# Altium PCB PCB1.PcbDoc (part 1 of 7)
Units mm, origin at the board's own origin, x right, y up, seen from the top; angles counter-clockwise.
Board outline 100 x 100 mm, 6 copper layers (Top, GND_1, Signal, PWR, GND_2, Bottom), stack 0.816 mm thick; 321 components, 260 nets, 1718 pads, 694 vias.
Unrouted connection lines stored in the file: 527.
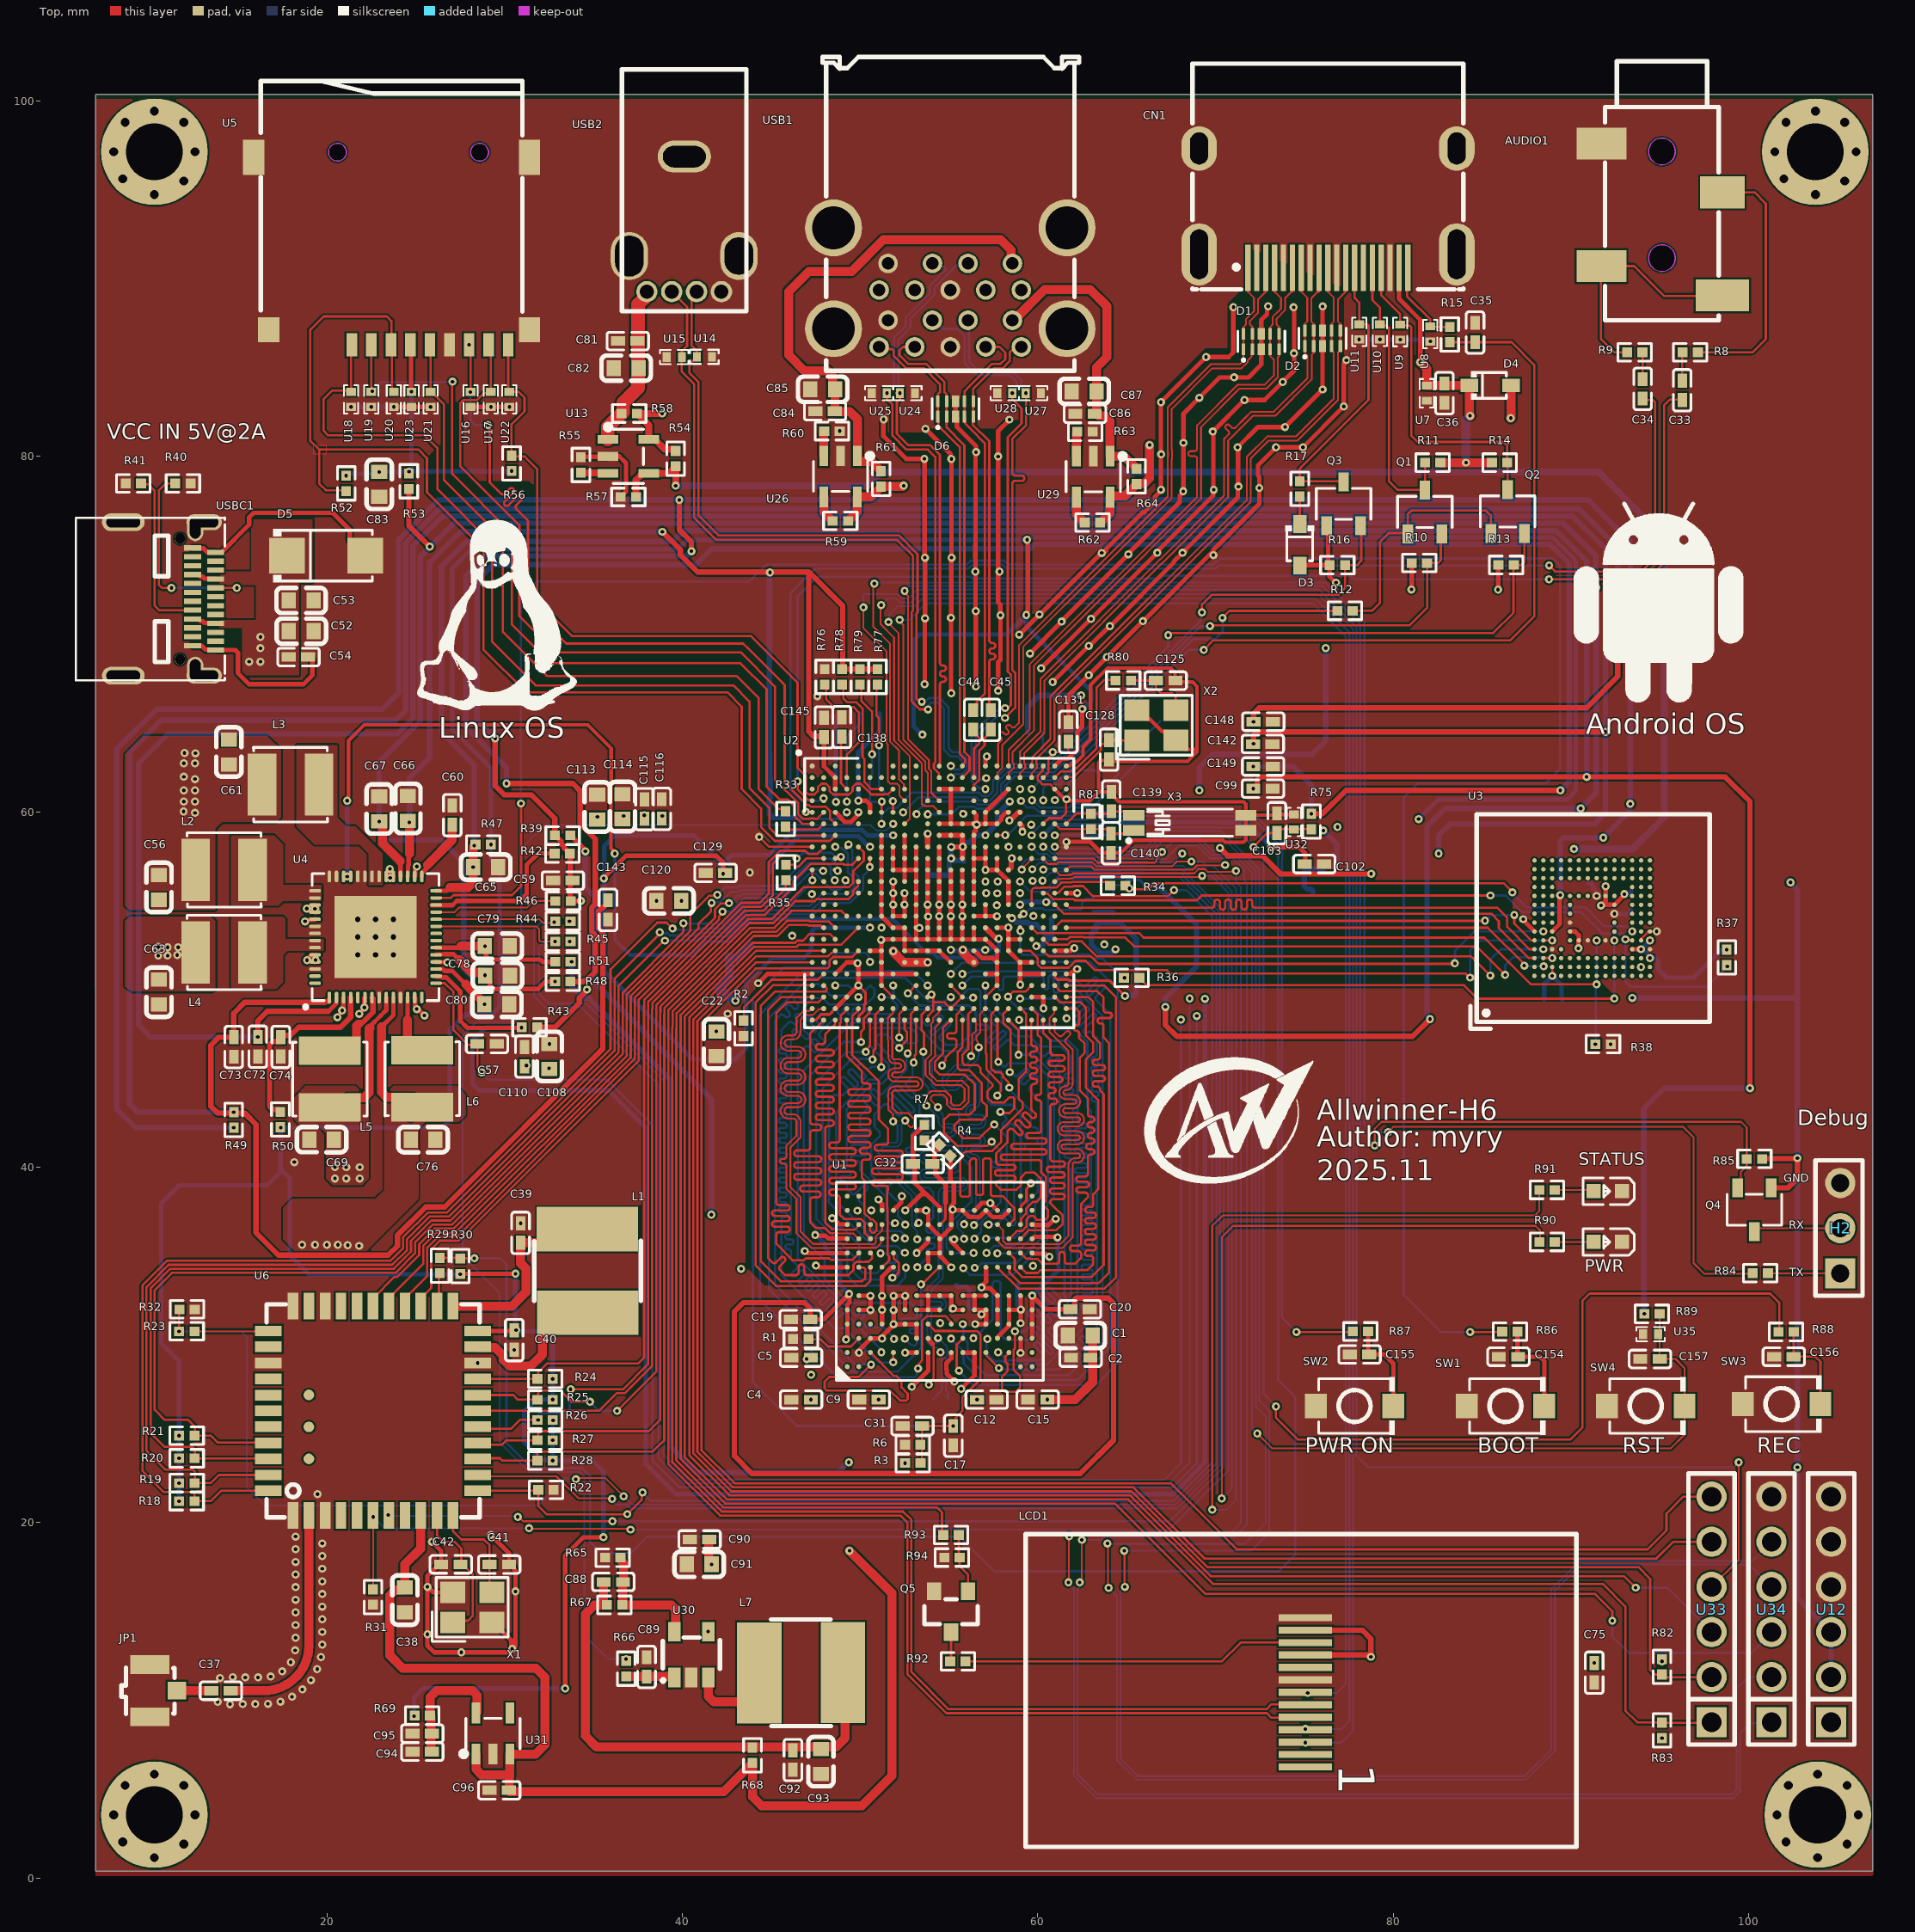
[diagram p0: Top view]
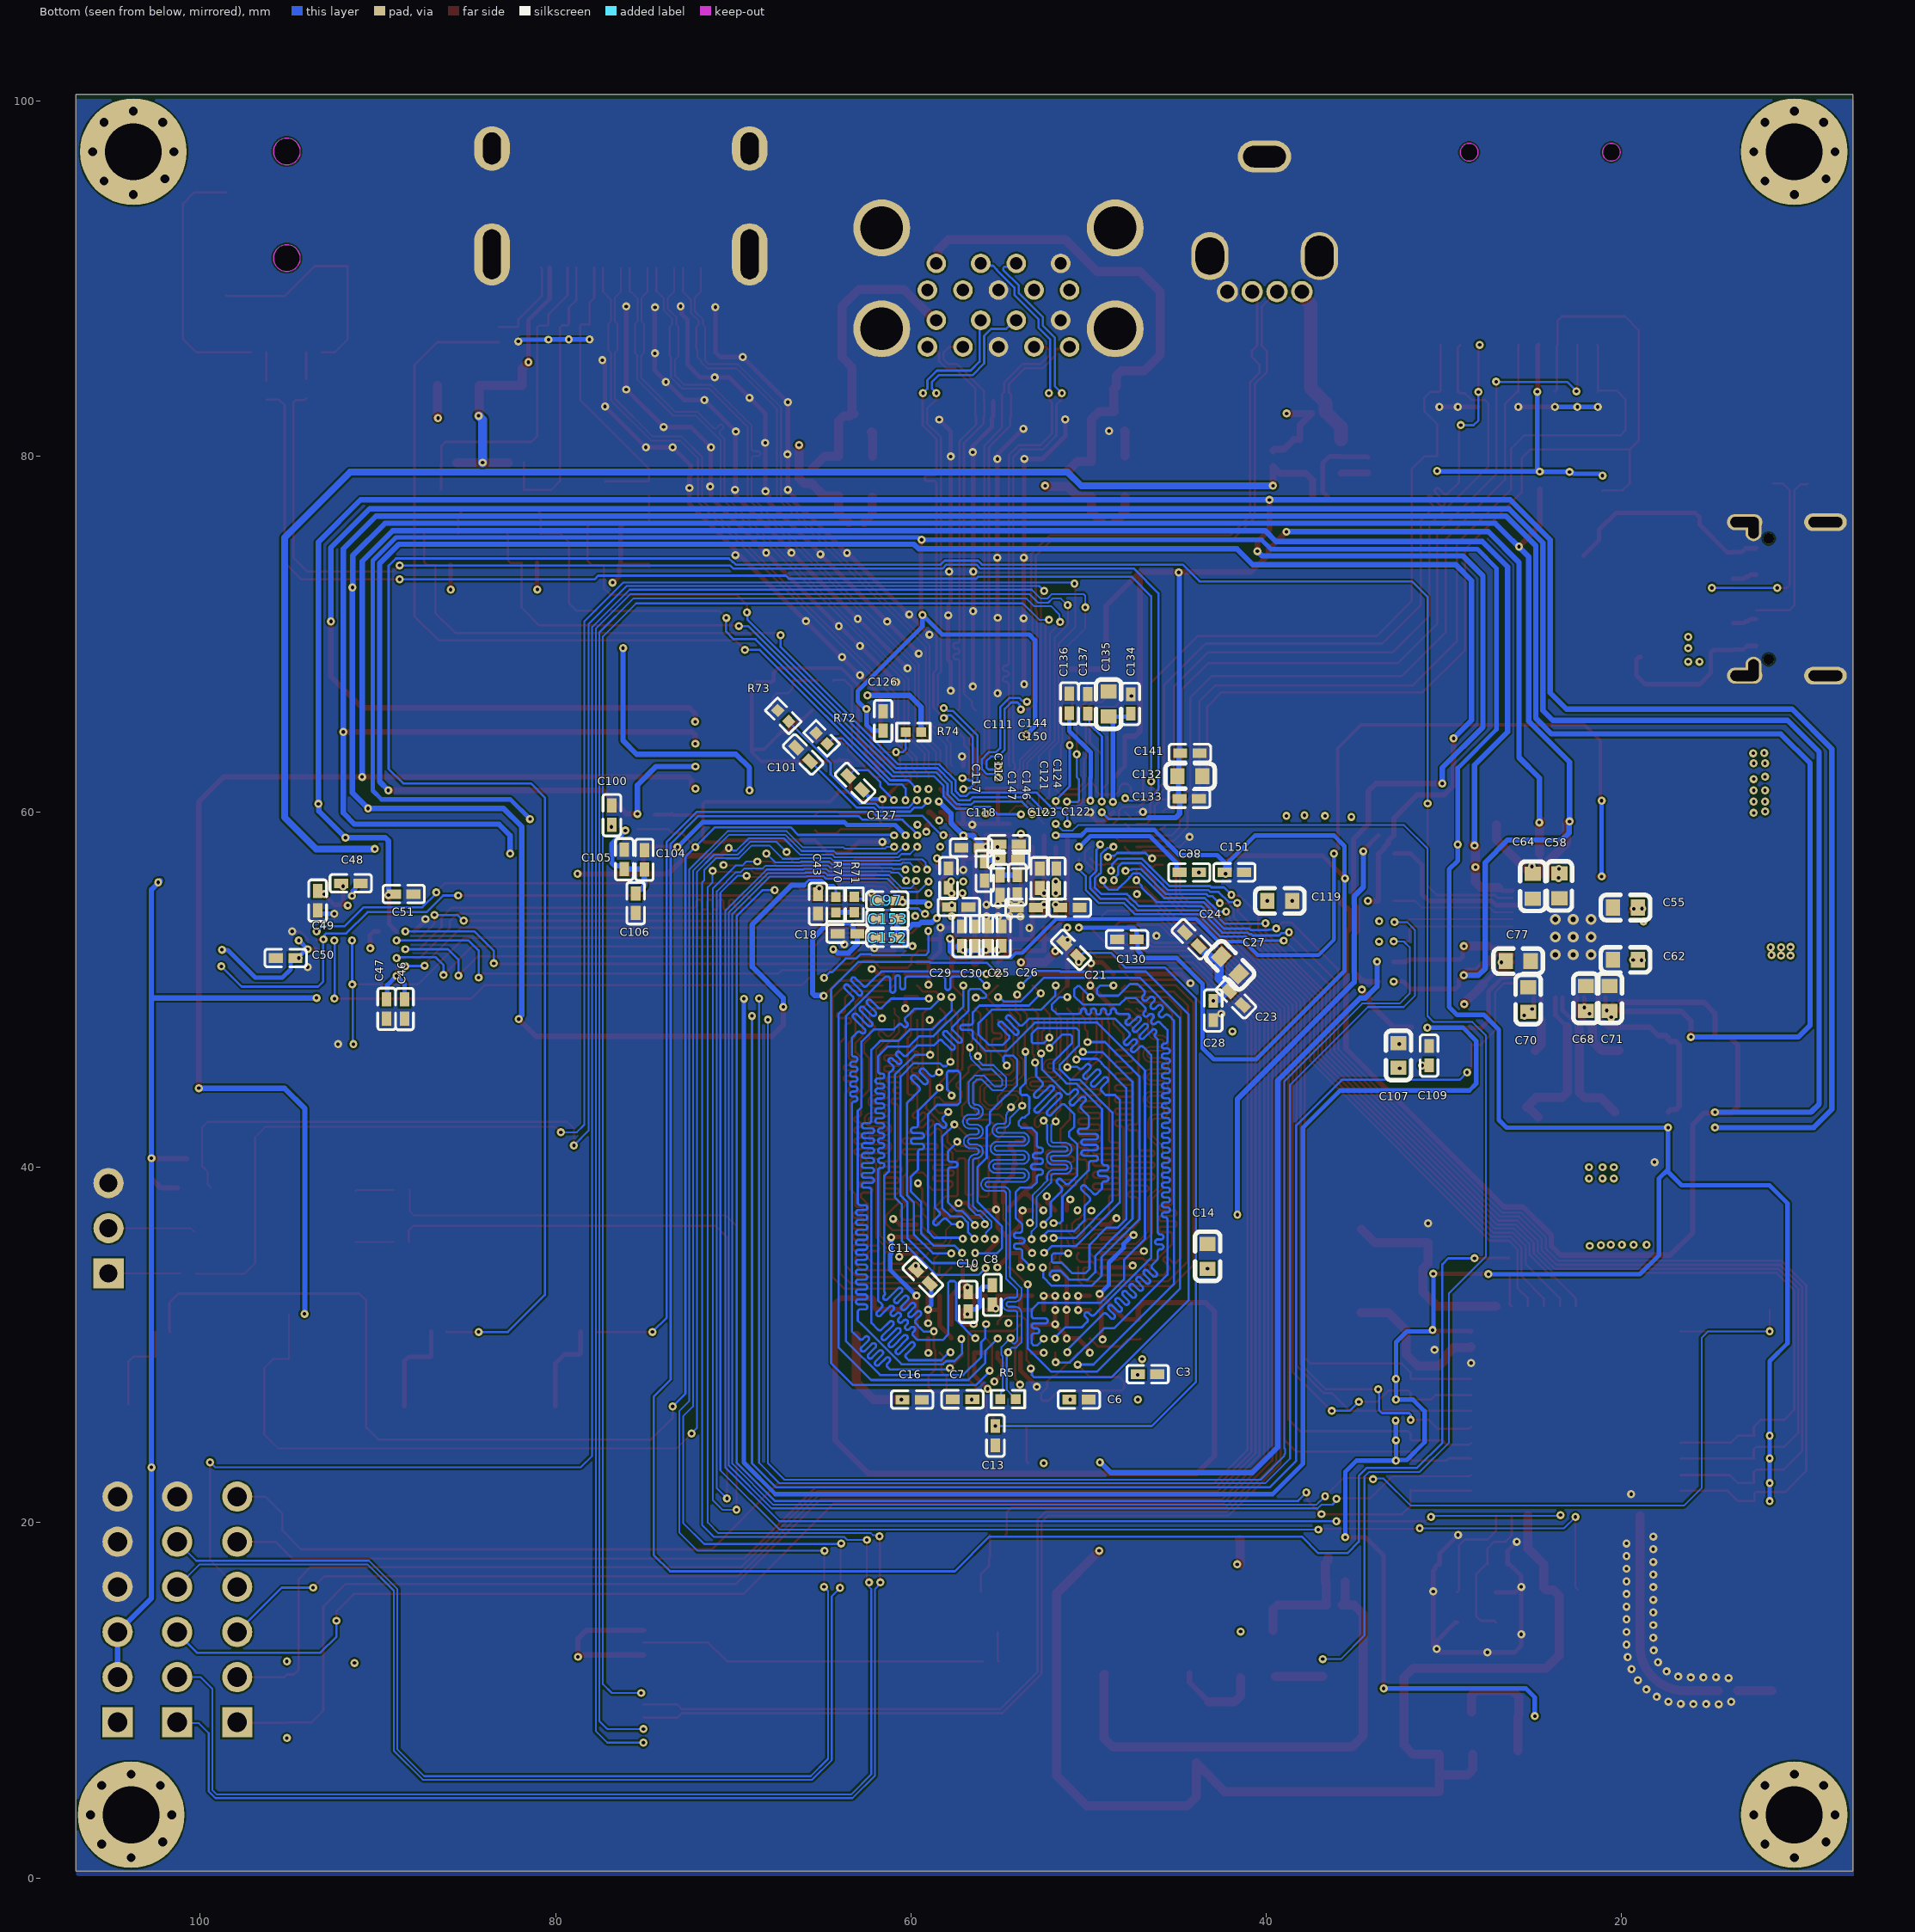
[diagram p1: Bottom view, seen from below]
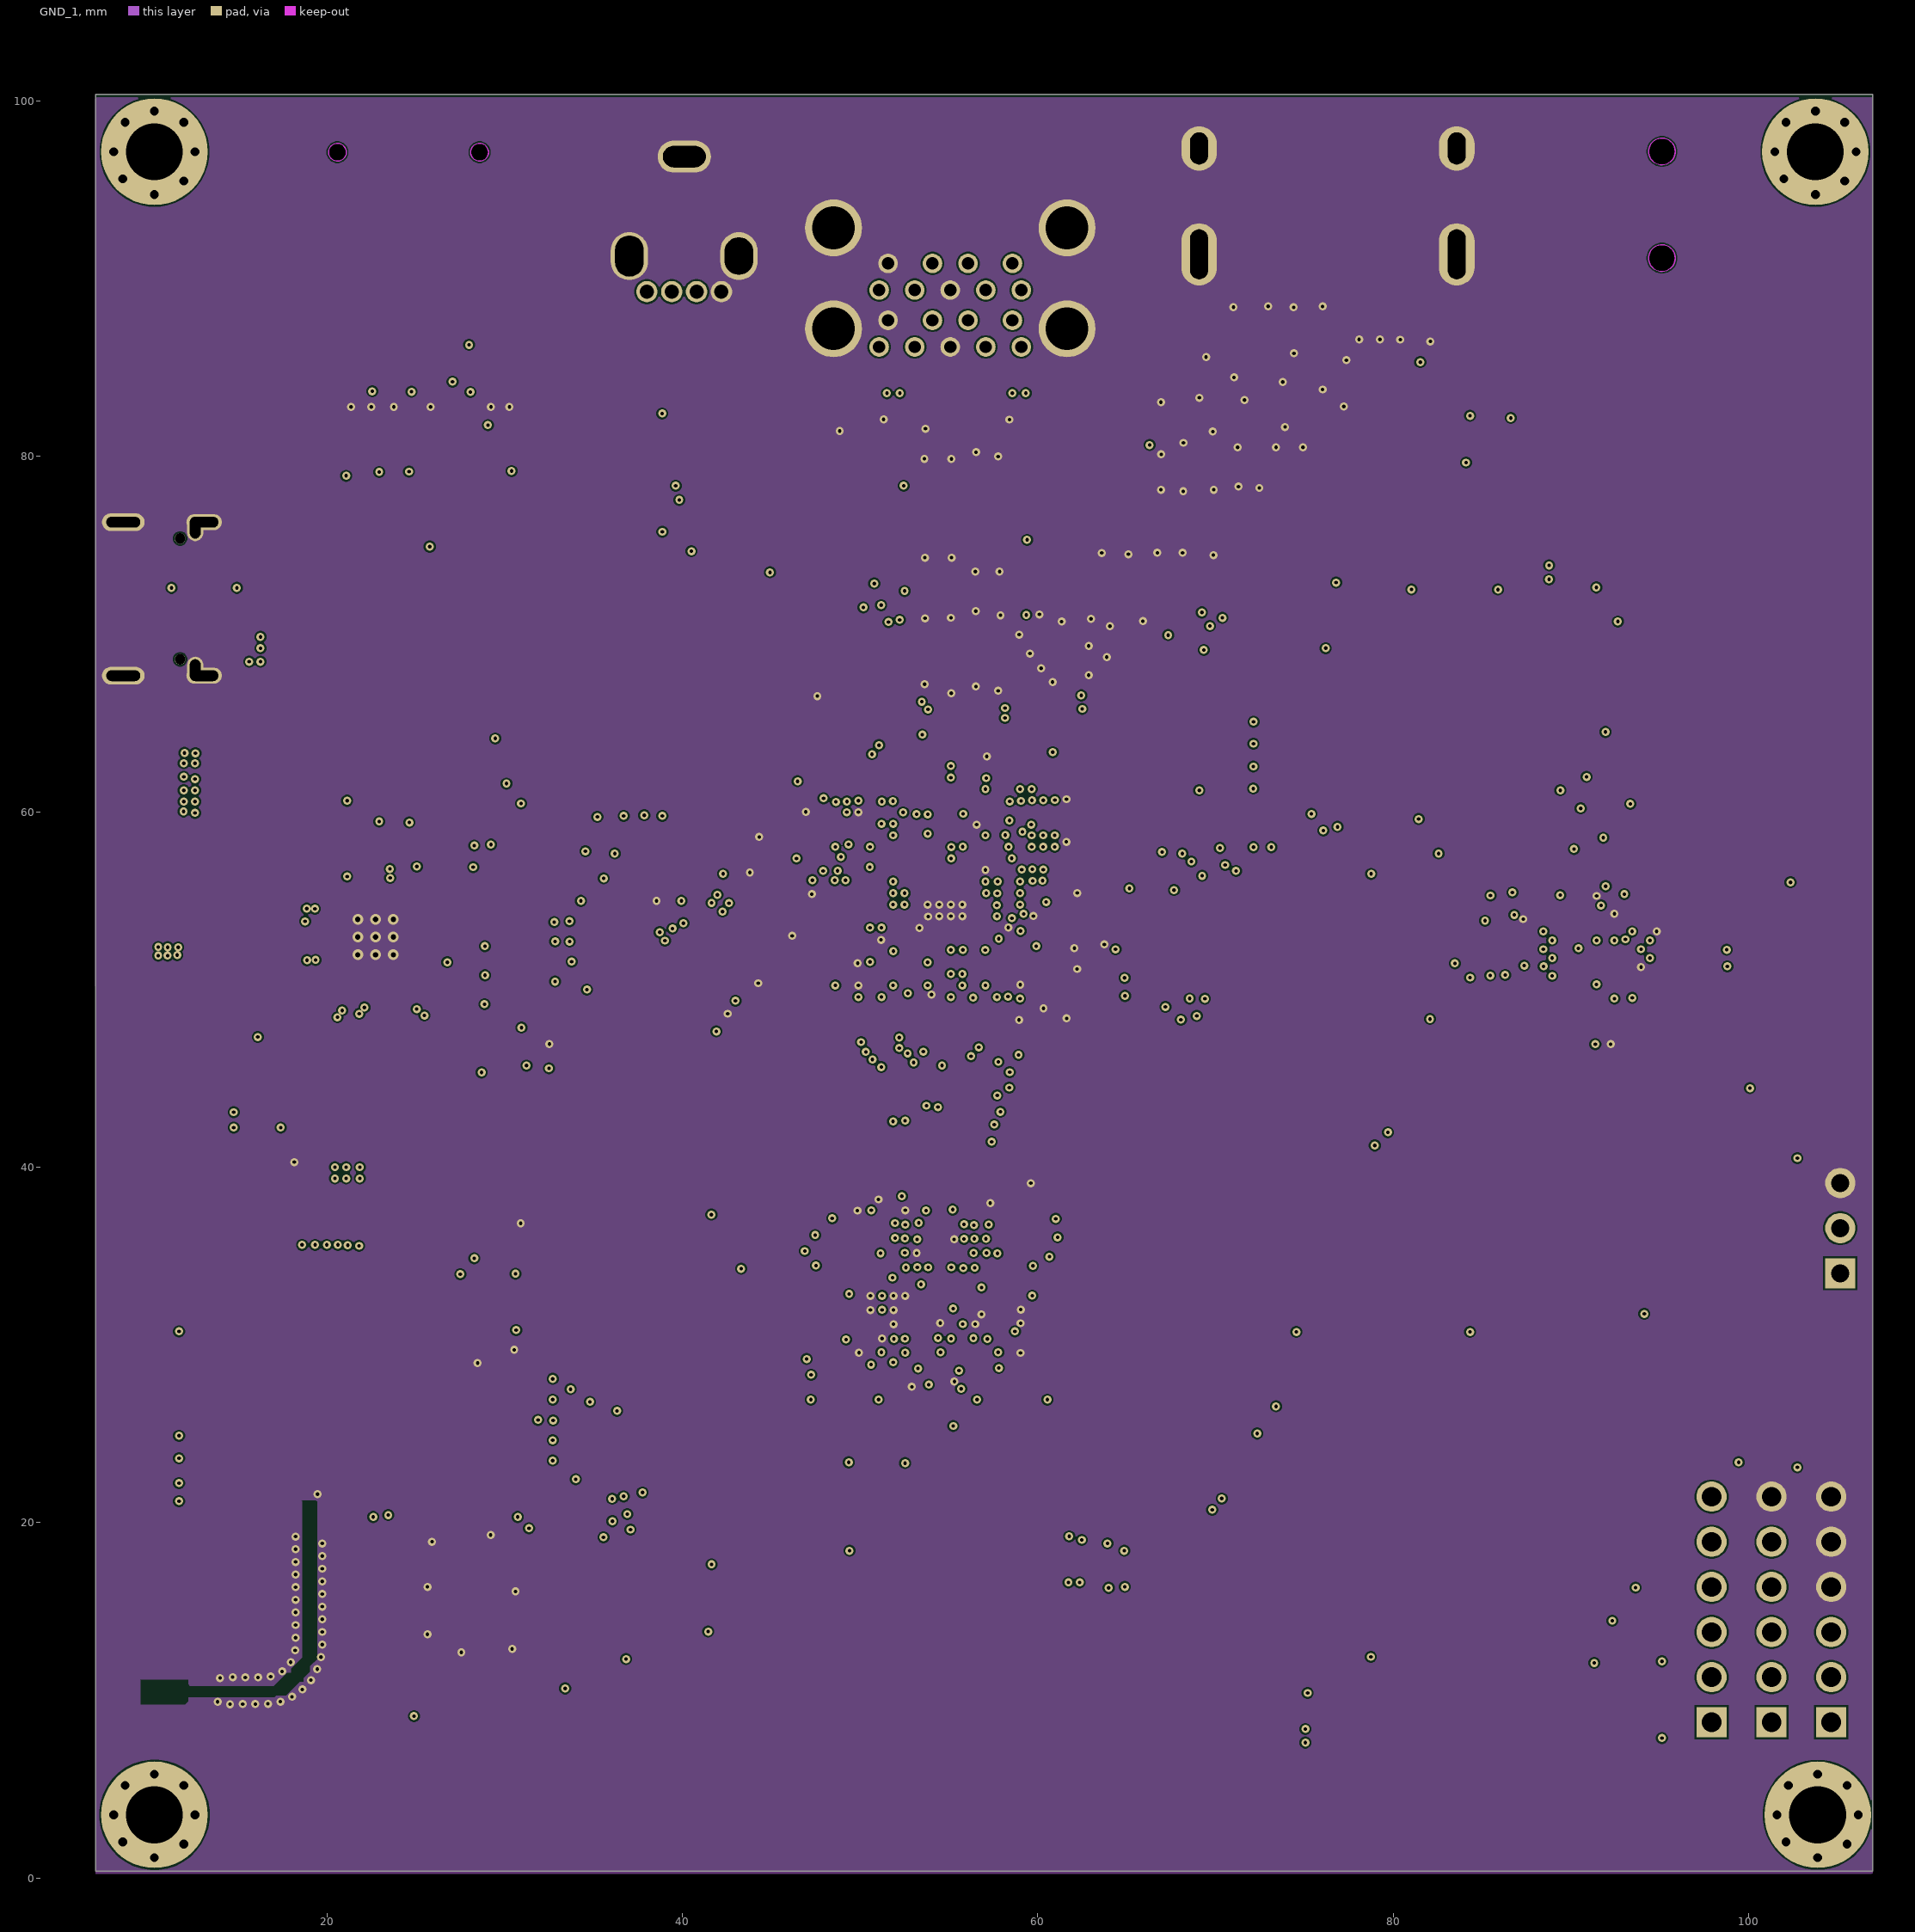
[diagram p2: GND_1]
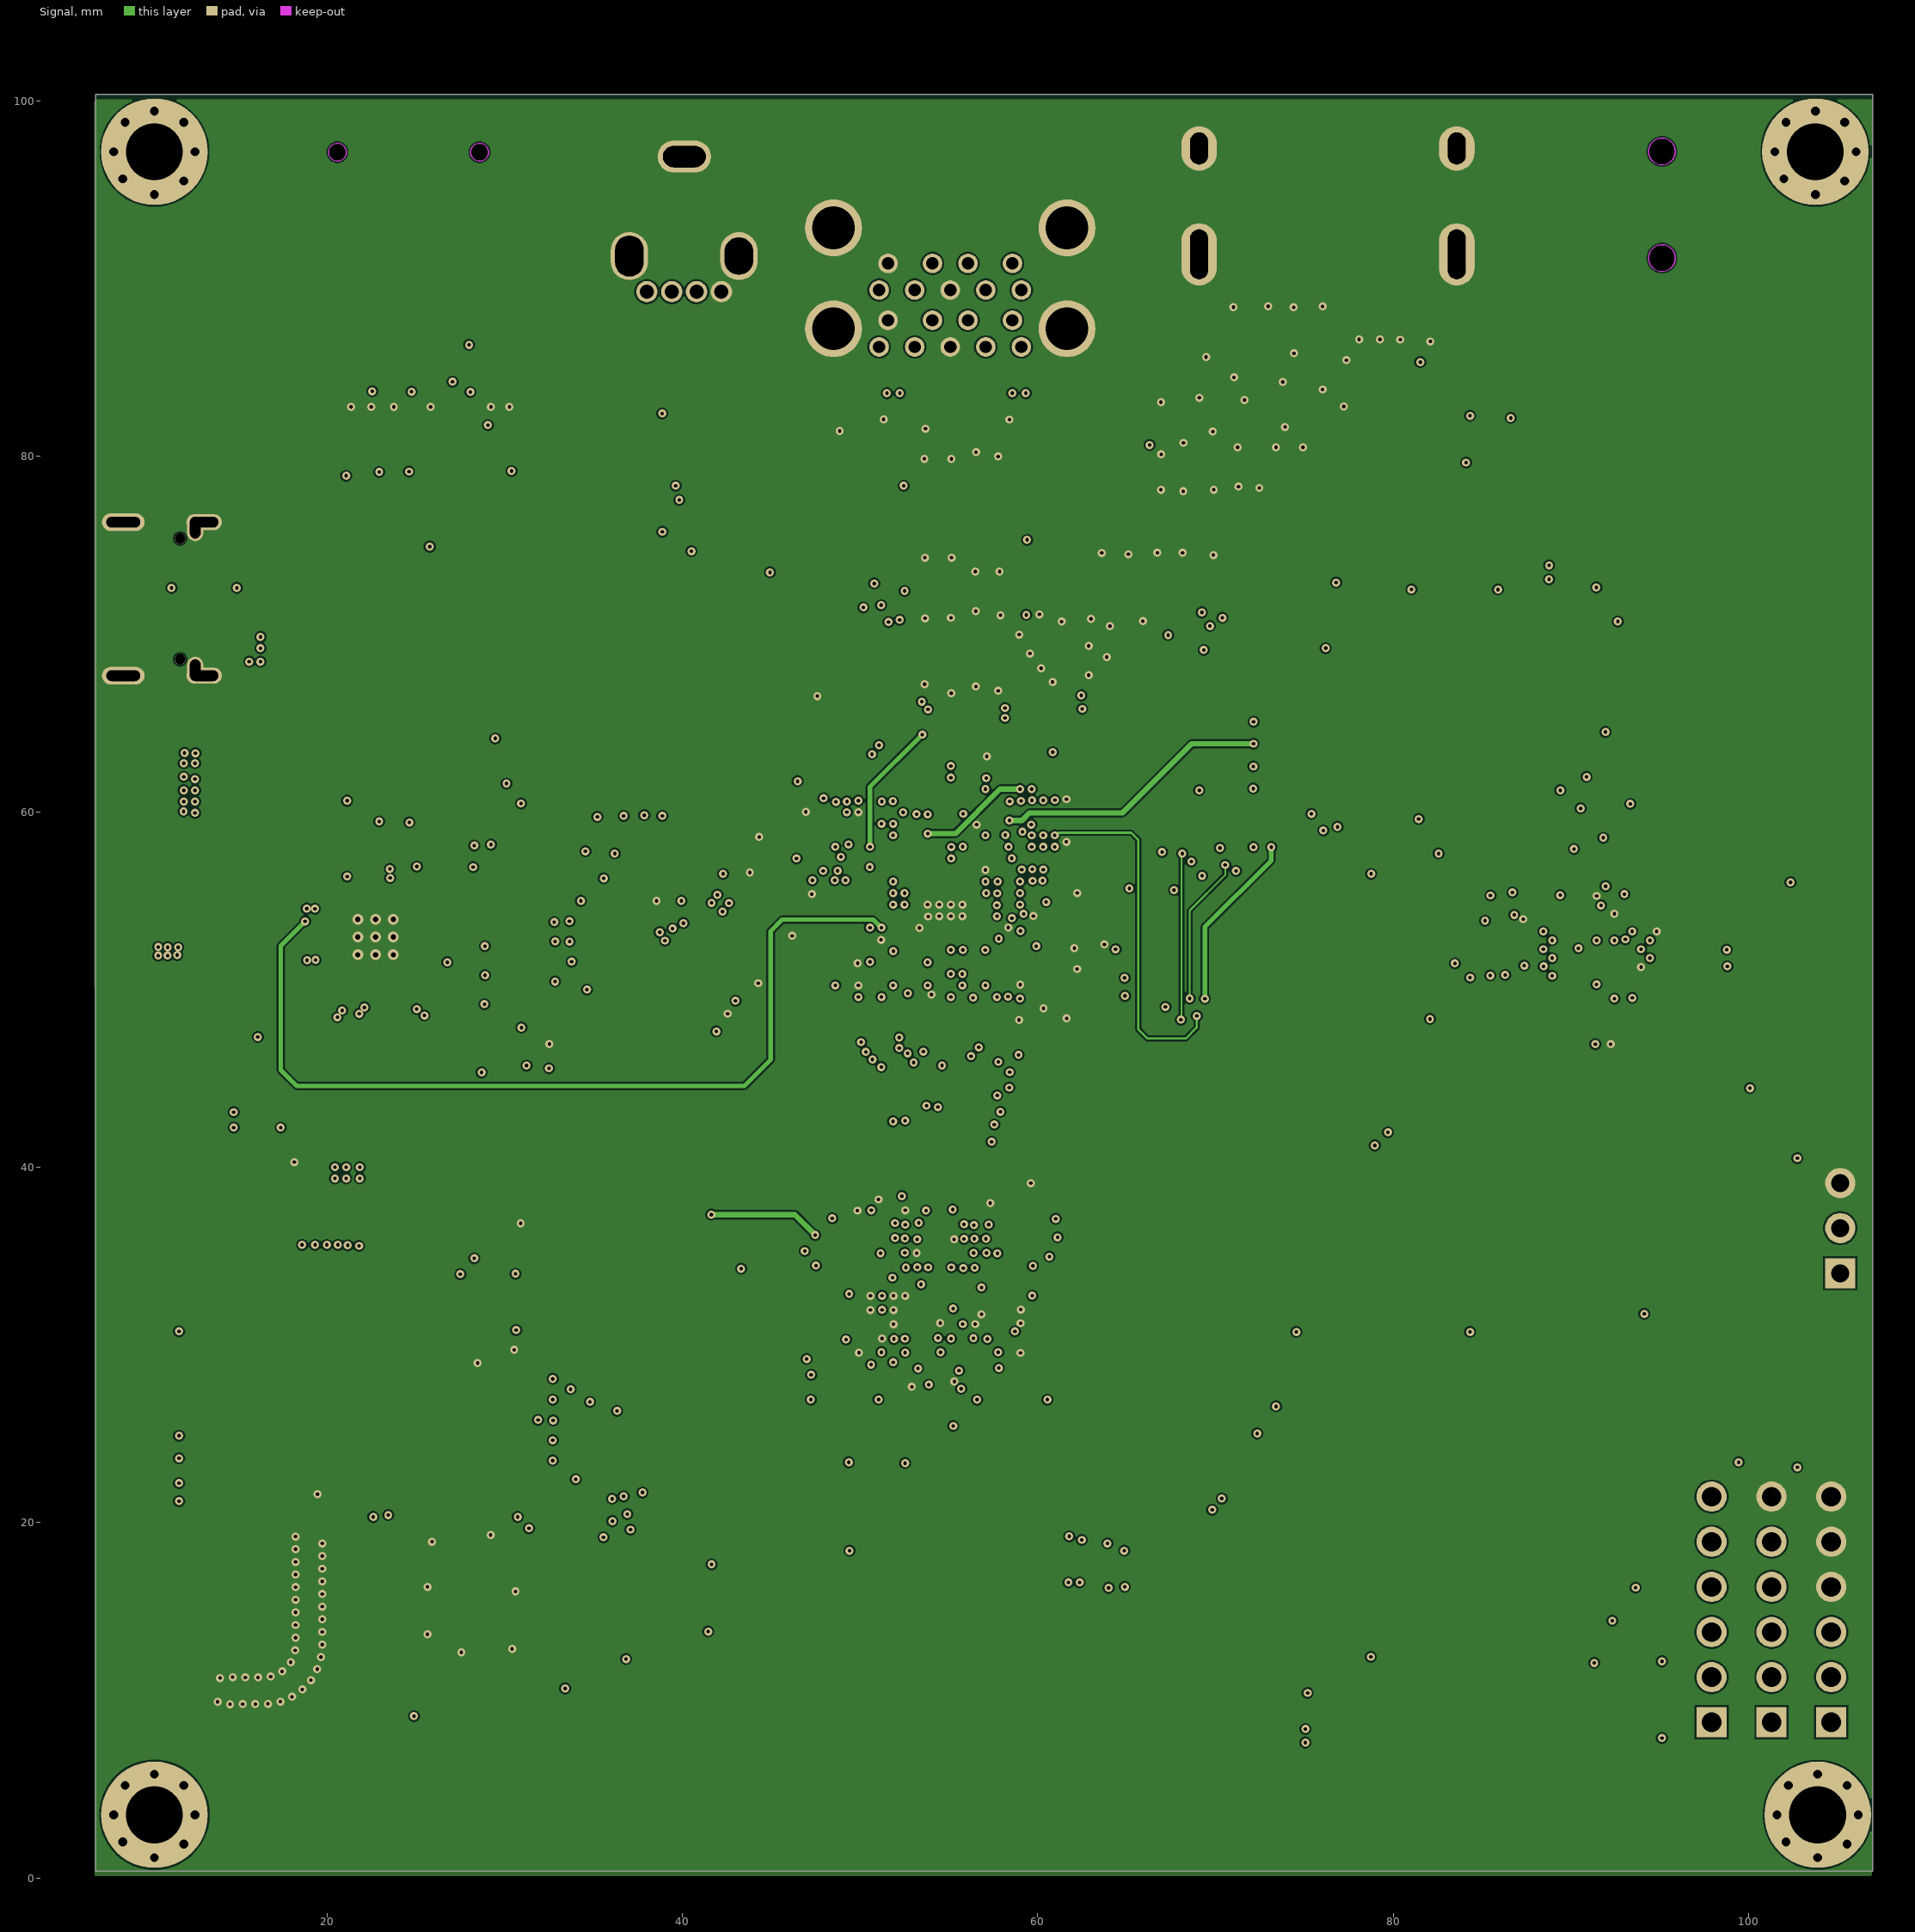
[diagram p3: Signal]
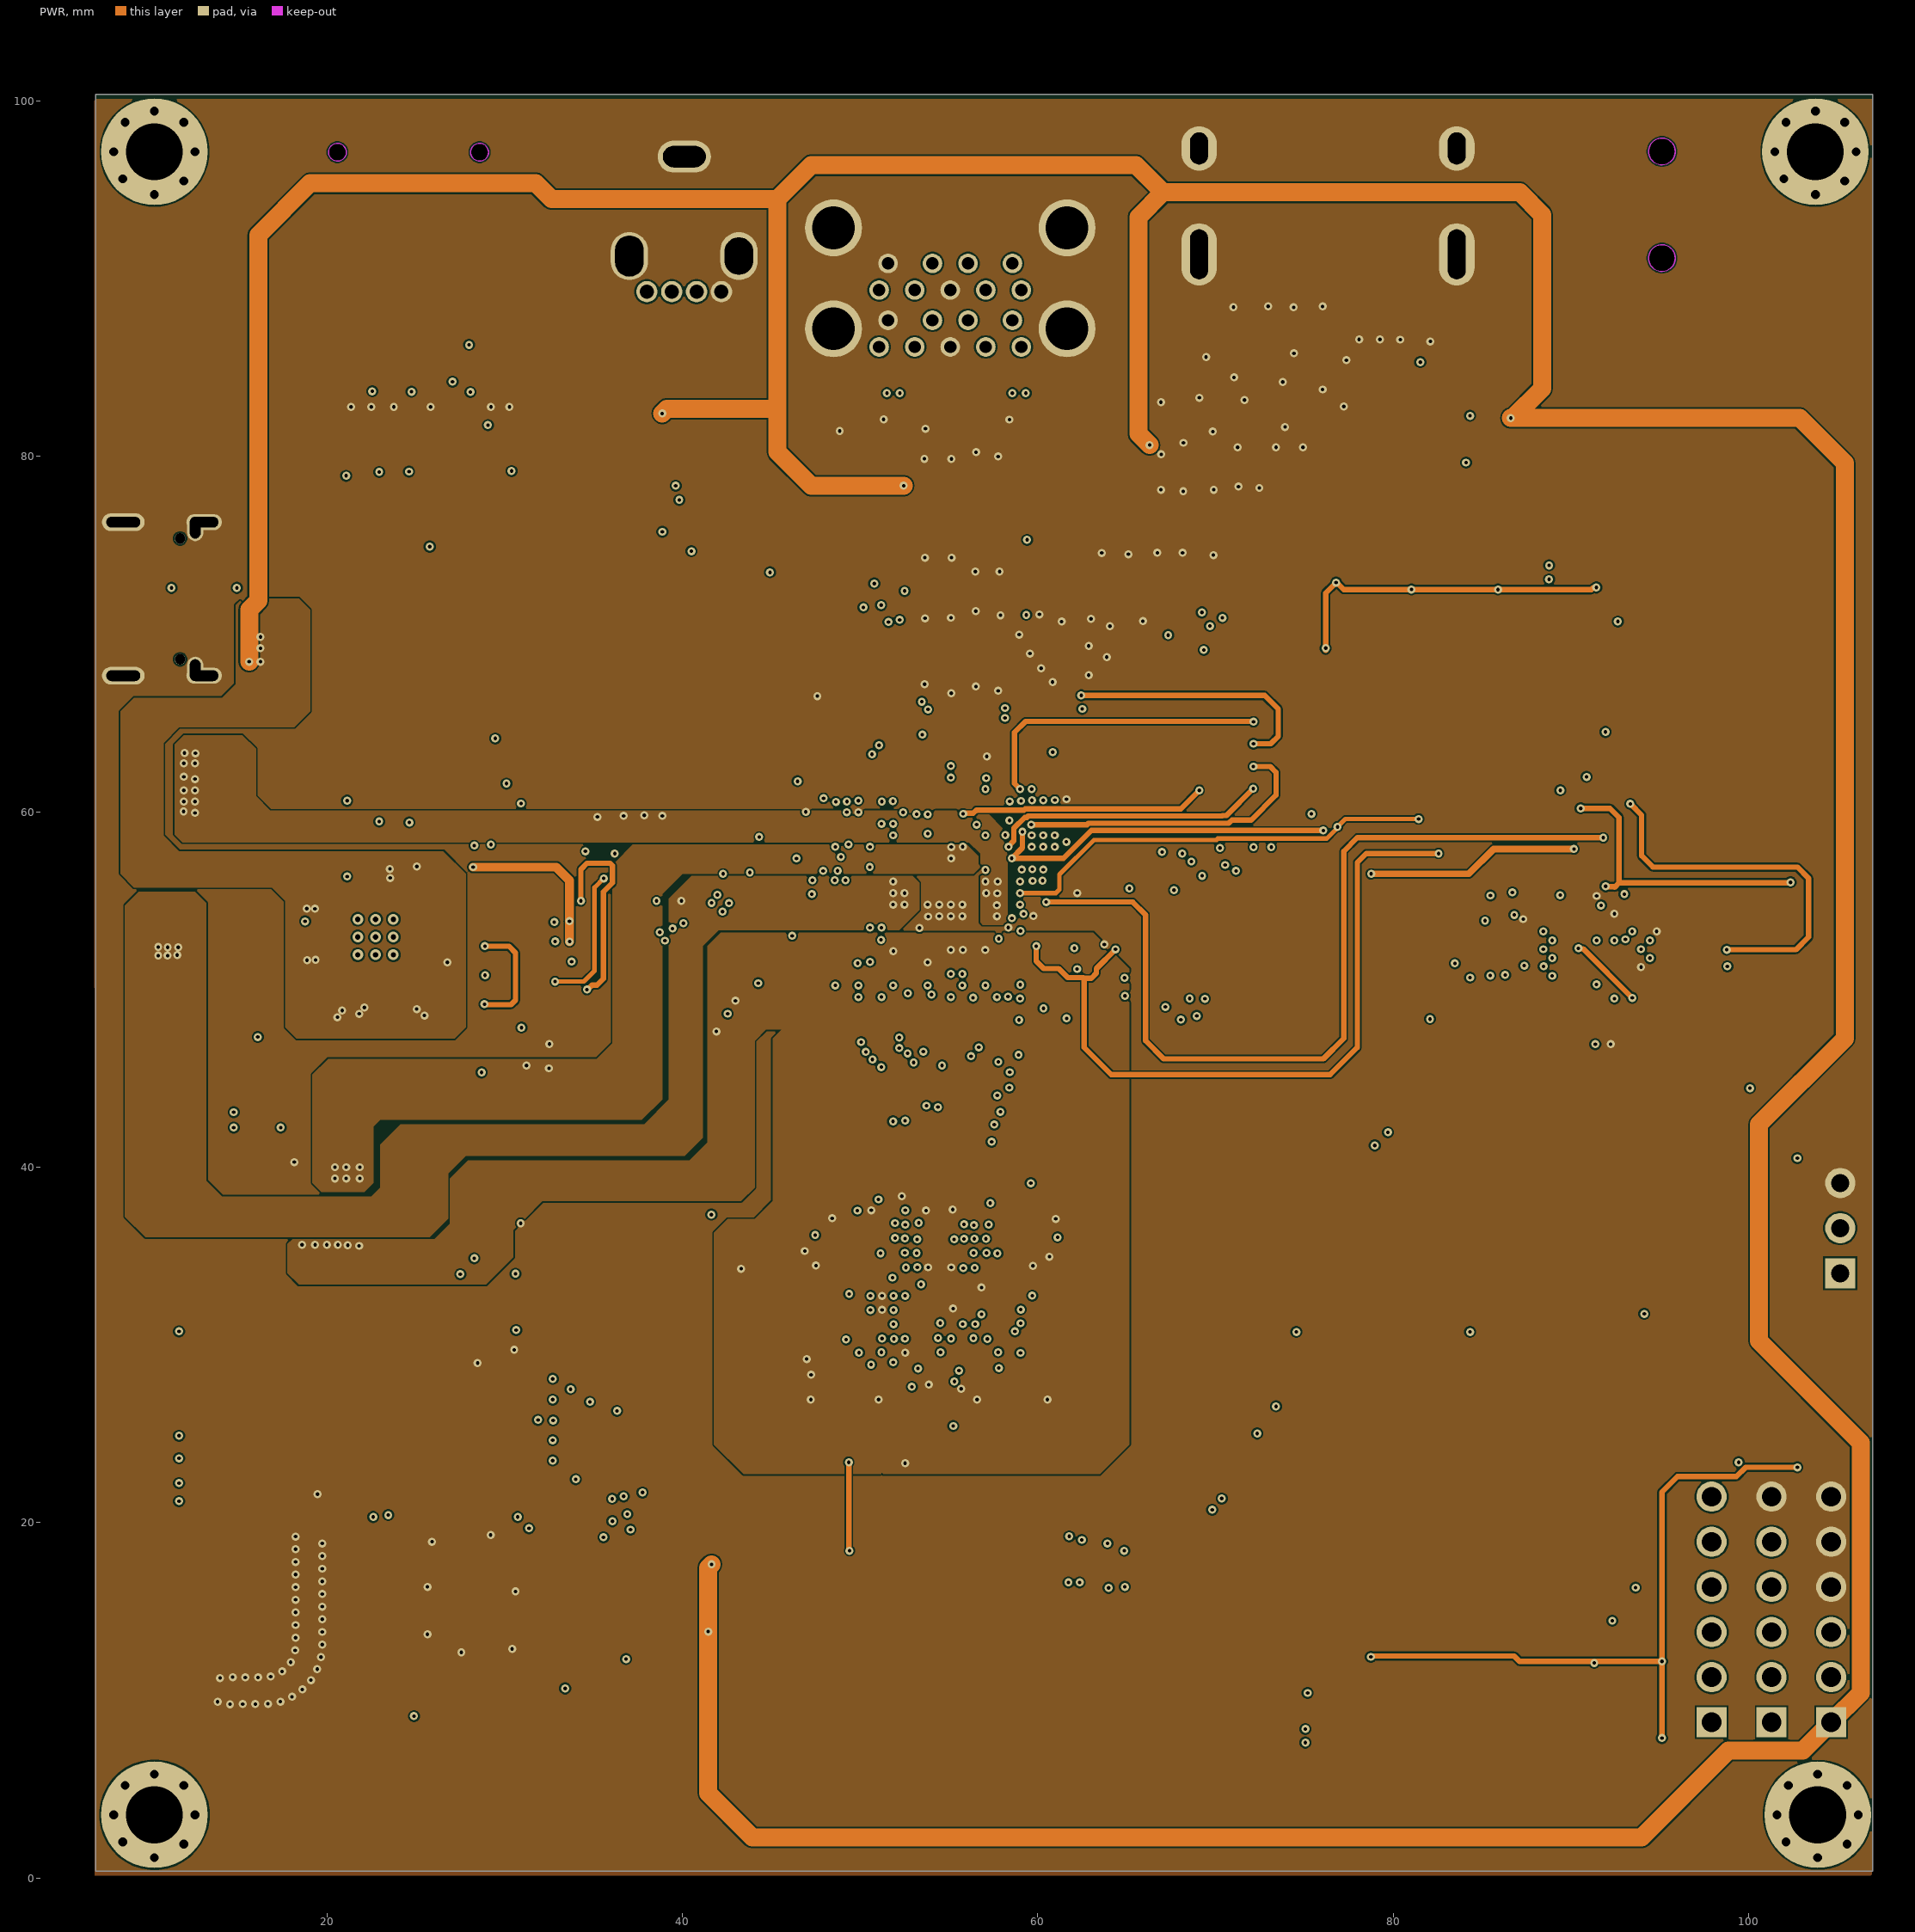
[diagram p4: PWR]
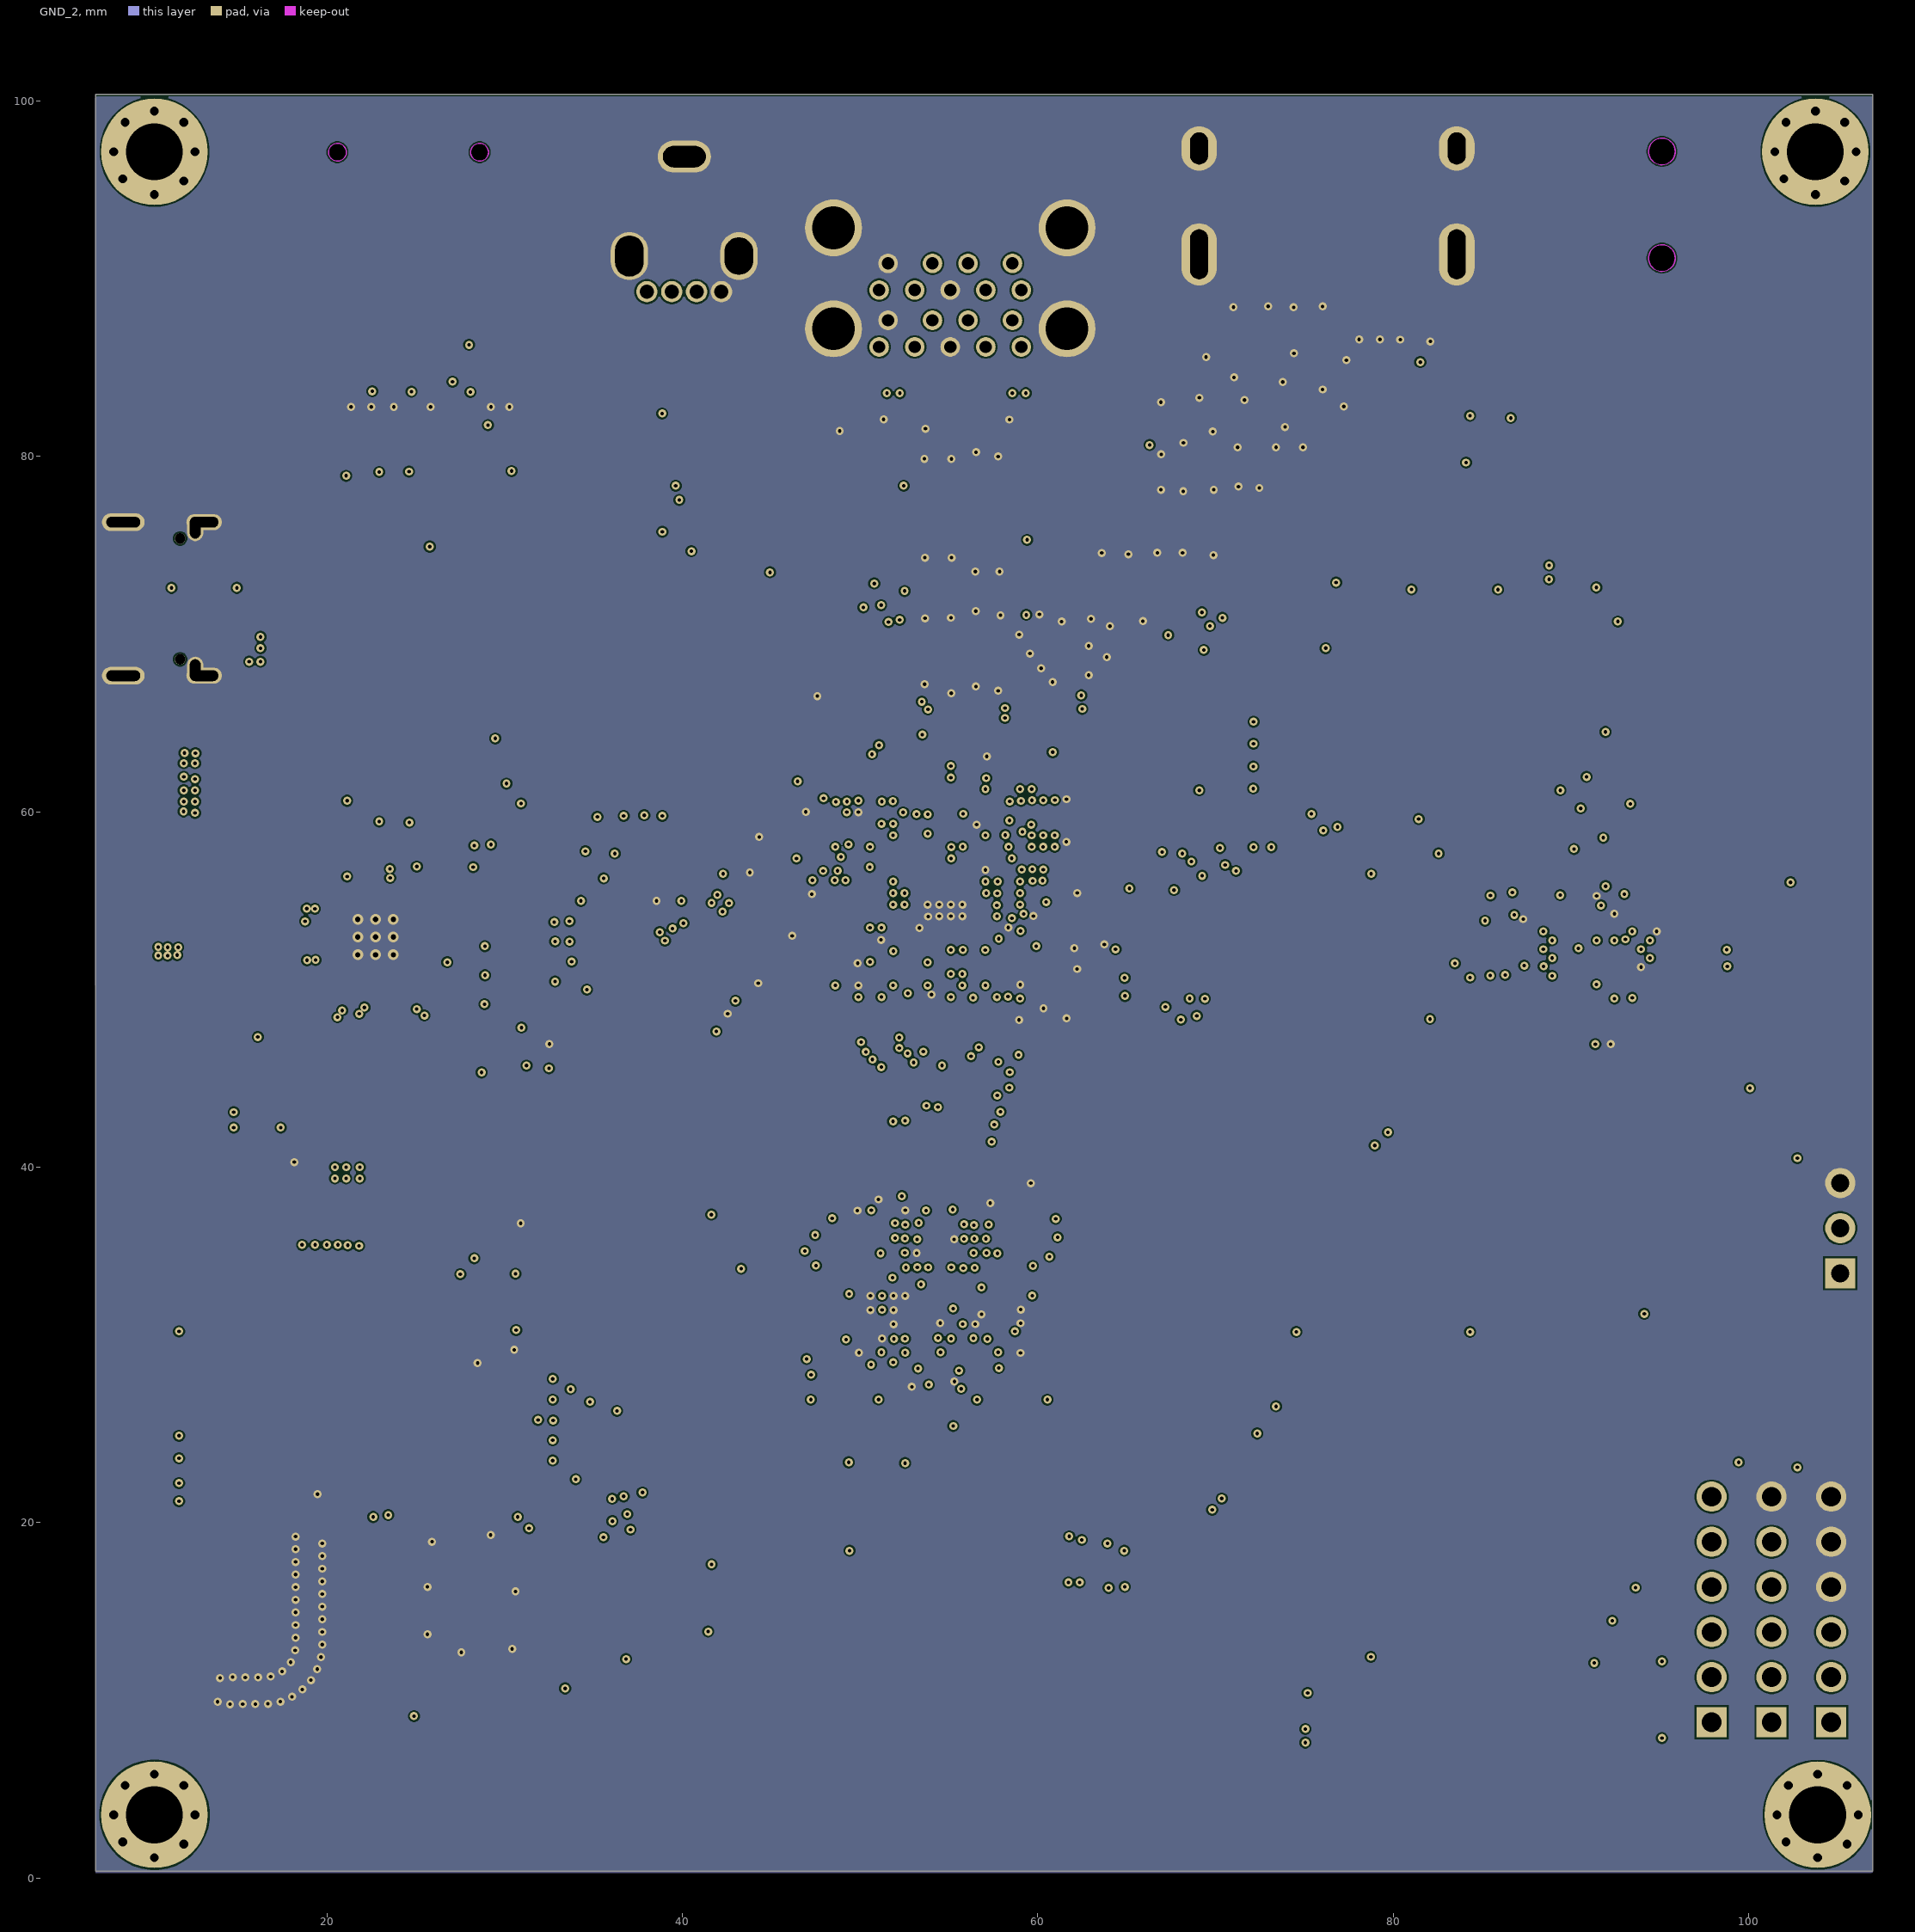
[diagram p5: GND_2]
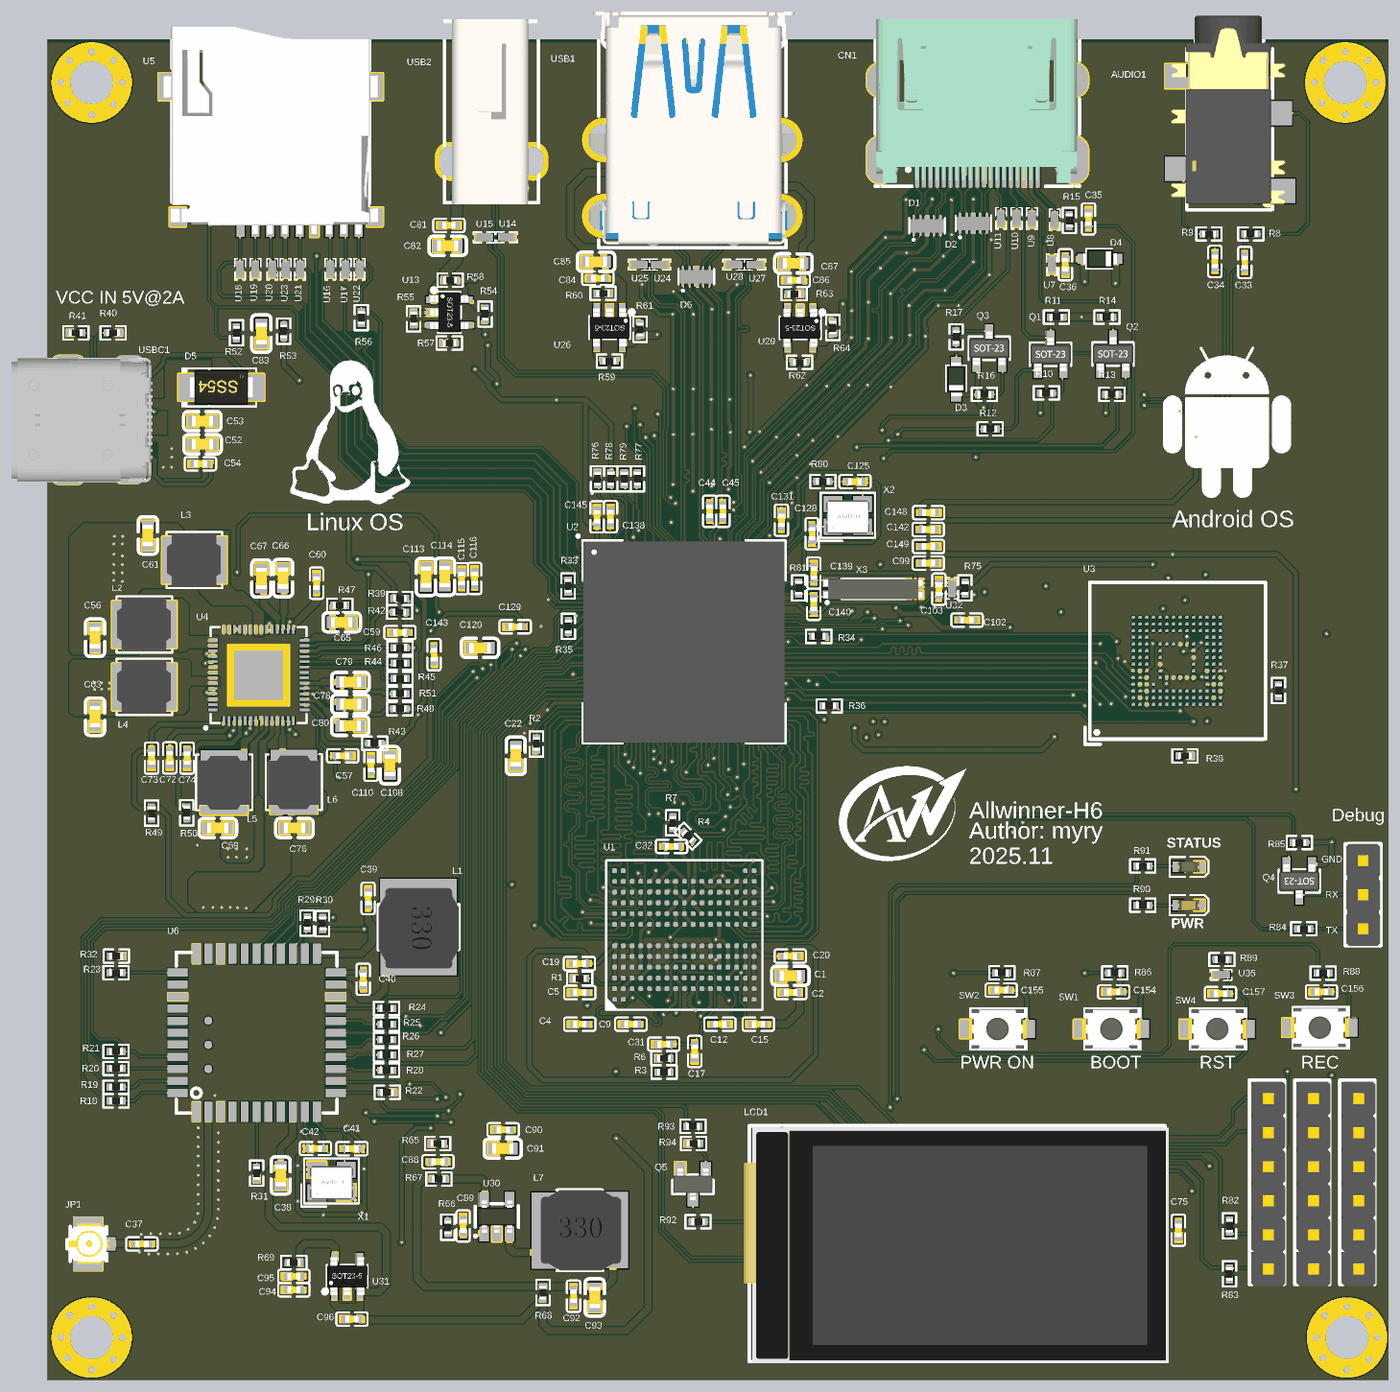
[diagram p11: 3D render of the assembled board from above, using the file's embedded part models]
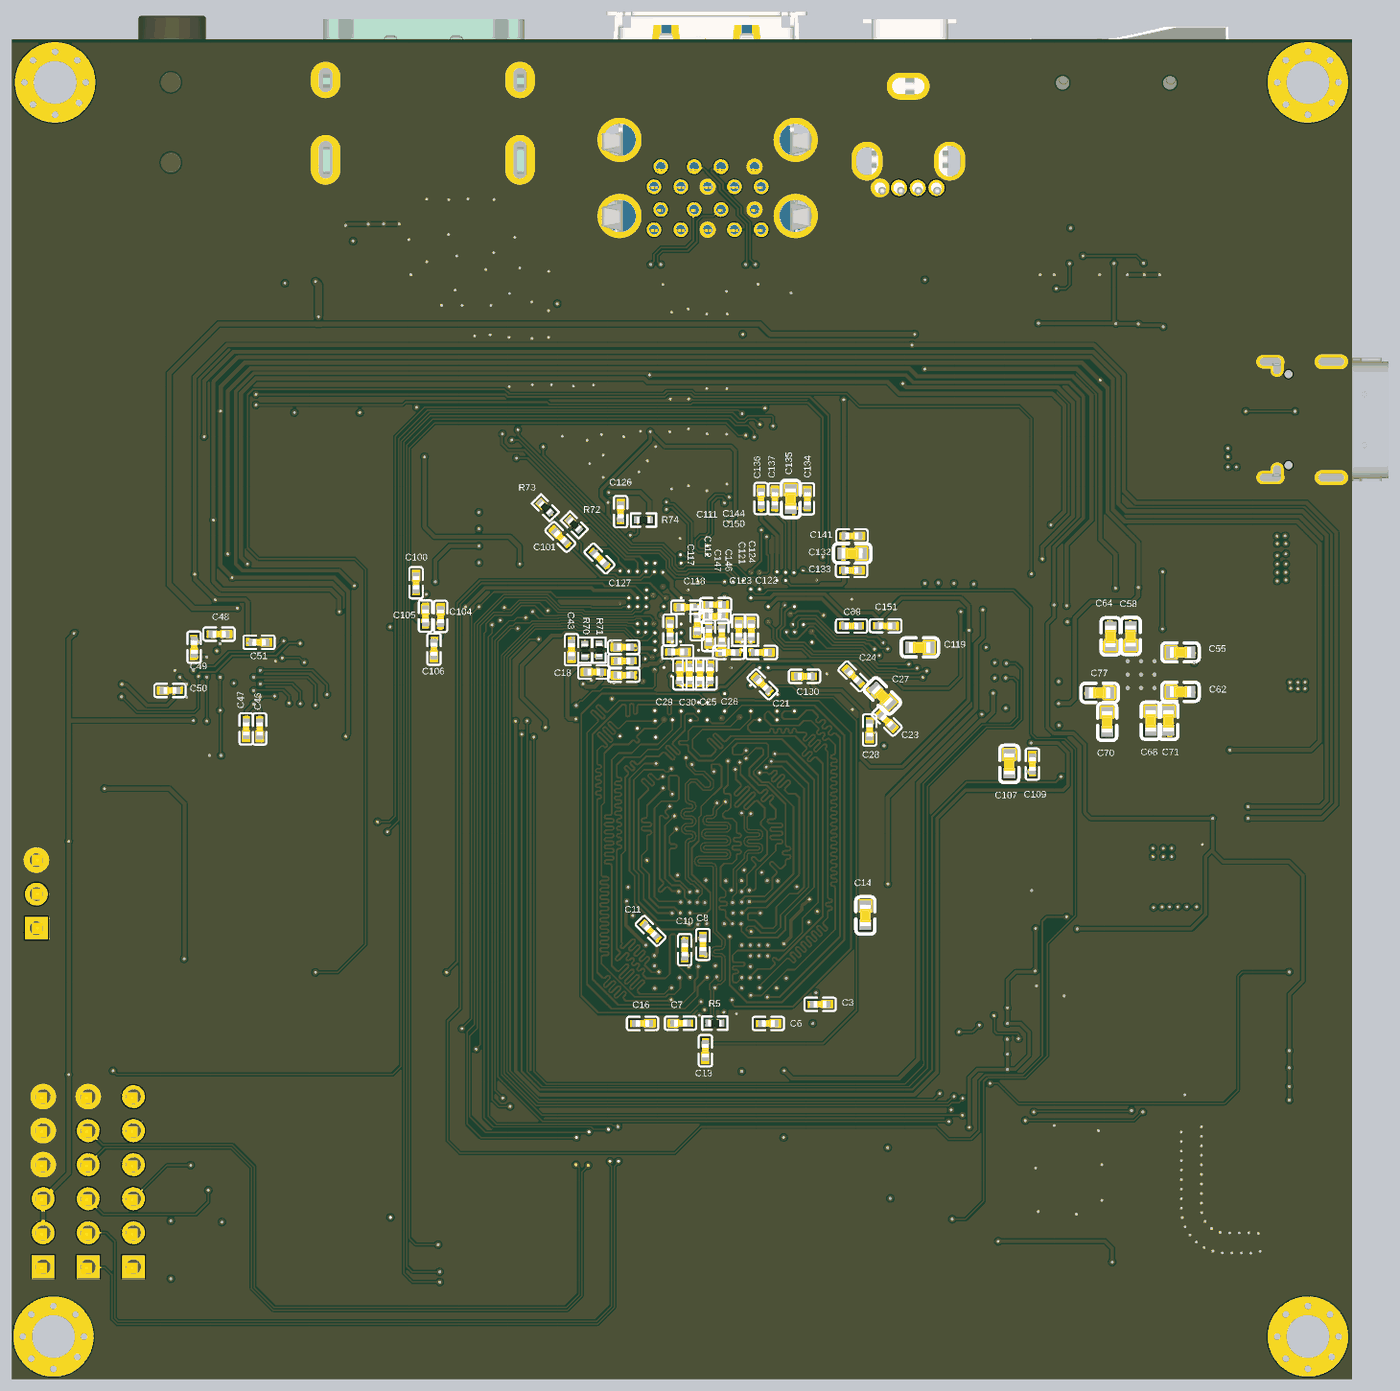
[diagram p12: 3D render of the assembled board from below, using the file's embedded part models]

## Layer stack, top to bottom
Top Solder: solder mask 0.0102, Solder Resist, Dk 3.5
Top: signal copper 0.035
Dielectric 2: prepreg 0.0711, PP-006, Dk 4.1
GND_1: signal copper 0.035
Dielectric 4: prepreg 0.0711, PP-006, Dk 4.1
Signal: signal copper 0.0356
Dielectric 1: dielectric 0.32, FR-4, Dk 4.8
PWR: signal copper 0.0356
Dielectric 5: prepreg 0.0711, PP-006, Dk 4.1
GND_2: signal copper 0.035
Dielectric 3: prepreg 0.0711, PP-006, Dk 4.1
Bottom: signal copper 0.035
Bottom Solder: solder mask 0.0102, Solder Resist, Dk 3.5

## Board outline
6.985,0.381 6.985,100.381 106.985,100.381 106.985,0.381

## Design rules (kind name [scope] priority, off if disabled: settings)
Clearance [All] p1: gap=0.1 ignorepadtopadclearanceinfootprint=FALSE
DiffPairsRouting 90ohm [InDifferentialPairClass('90ohm')] p1: maxlimit=0.254 minlimit=0.127 mostfreqgap=0.127 toplayer_minwidth=0.127 toplayer_maxwidth=0.127 toplayer_prefwidth=0.127 midlayer1_minwidth=0.127 midlayer1_maxwidth=0.127 midlayer1_prefwidth=0.127 midlayer2_minwidth=0.127 midlayer2_maxwidth=0.127 midlayer2_prefwidth=0.127 midlayer3_minwidth=0.127 midlayer3_maxwidth=0.127 midlayer3_prefwidth=0.127 midlayer4_minwidth=0.127 midlayer4_maxwidth=0.127 midlayer4_prefwidth=0.127 bottomlayer_minwidth=0.127 bottomlayer_maxwidth=0.127 bottomlayer_prefwidth=0.127 maxuncoupledlength=12.7
DiffPairsRouting 100ohm [InDifferentialPairClass('100ohm')] p2: maxlimit=0.254 minlimit=0.127 mostfreqgap=0.127 toplayer_minwidth=0.102 toplayer_maxwidth=0.102 toplayer_prefwidth=0.102 midlayer1_minwidth=0.102 midlayer1_maxwidth=0.102 midlayer1_prefwidth=0.102 midlayer2_minwidth=0.102 midlayer2_maxwidth=0.102 midlayer2_prefwidth=0.102 midlayer3_minwidth=0.102 midlayer3_maxwidth=0.102 midlayer3_prefwidth=0.102 midlayer4_minwidth=0.102 midlayer4_maxwidth=0.102 midlayer4_prefwidth=0.102 bottomlayer_minwidth=0.102 bottomlayer_maxwidth=0.102 bottomlayer_prefwidth=0.102 maxuncoupledlength=12.7
DiffPairsRouting diff_ddr3_sck [InDifferentialPair('SCK')] p3: maxlimit=0.254 minlimit=0.127 mostfreqgap=0.127 toplayer_minwidth=0.102 toplayer_maxwidth=0.102 toplayer_prefwidth=0.102 midlayer1_minwidth=0.102 midlayer1_maxwidth=0.102 midlayer1_prefwidth=0.102 midlayer2_minwidth=0.102 midlayer2_maxwidth=0.102 midlayer2_prefwidth=0.102 midlayer3_minwidth=0.102 midlayer3_maxwidth=0.102 midlayer3_prefwidth=0.102 midlayer4_minwidth=0.102 midlayer4_maxwidth=0.102 midlayer4_prefwidth=0.102 bottomlayer_minwidth=0.102 bottomlayer_maxwidth=0.102 bottomlayer_prefwidth=0.102 maxuncoupledlength=12.7 // 100ohm
DiffPairsRouting diff_ddr3_0 [InDifferentialPair('SDQS0')] p4: maxlimit=0.254 minlimit=0.127 mostfreqgap=0.127 toplayer_minwidth=0.102 toplayer_maxwidth=0.102 toplayer_prefwidth=0.102 midlayer1_minwidth=0.102 midlayer1_maxwidth=0.102 midlayer1_prefwidth=0.102 midlayer2_minwidth=0.102 midlayer2_maxwidth=0.102 midlayer2_prefwidth=0.102 midlayer3_minwidth=0.102 midlayer3_maxwidth=0.102 midlayer3_prefwidth=0.102 midlayer4_minwidth=0.102 midlayer4_maxwidth=0.102 midlayer4_prefwidth=0.102 bottomlayer_minwidth=0.102 bottomlayer_maxwidth=0.102 bottomlayer_prefwidth=0.102 maxuncoupledlength=12.7 // 100ohm
DiffPairsRouting diff_ddr3_2 [InDifferentialPair('SDQS2')] p5: maxlimit=0.254 minlimit=0.127 mostfreqgap=0.127 toplayer_minwidth=0.102 toplayer_maxwidth=0.102 toplayer_prefwidth=0.102 midlayer1_minwidth=0.102 midlayer1_maxwidth=0.102 midlayer1_prefwidth=0.102 midlayer2_minwidth=0.102 midlayer2_maxwidth=0.102 midlayer2_prefwidth=0.102 midlayer3_minwidth=0.102 midlayer3_maxwidth=0.102 midlayer3_prefwidth=0.102 midlayer4_minwidth=0.102 midlayer4_maxwidth=0.102 midlayer4_prefwidth=0.102 bottomlayer_minwidth=0.102 bottomlayer_maxwidth=0.102 bottomlayer_prefwidth=0.102 maxuncoupledlength=12.7
DiffPairsRouting diff_ddr3_1 [InDifferentialPair('SDQS1')] p6: maxlimit=0.254 minlimit=0.127 mostfreqgap=0.127 toplayer_minwidth=0.102 toplayer_maxwidth=0.102 toplayer_prefwidth=0.102 midlayer1_minwidth=0.102 midlayer1_maxwidth=0.102 midlayer1_prefwidth=0.102 midlayer2_minwidth=0.102 midlayer2_maxwidth=0.102 midlayer2_prefwidth=0.102 midlayer3_minwidth=0.102 midlayer3_maxwidth=0.102 midlayer3_prefwidth=0.102 midlayer4_minwidth=0.102 midlayer4_maxwidth=0.102 midlayer4_prefwidth=0.102 bottomlayer_minwidth=0.102 bottomlayer_maxwidth=0.102 bottomlayer_prefwidth=0.102 maxuncoupledlength=12.7 // 100ohm
DiffPairsRouting diff_ddr3_3 [InDifferentialPair('SDQS3')] p7: maxlimit=0.254 minlimit=0.127 mostfreqgap=0.127 toplayer_minwidth=0.102 toplayer_maxwidth=0.102 toplayer_prefwidth=0.102 midlayer1_minwidth=0.102 midlayer1_maxwidth=0.102 midlayer1_prefwidth=0.102 midlayer2_minwidth=0.102 midlayer2_maxwidth=0.102 midlayer2_prefwidth=0.102 midlayer3_minwidth=0.102 midlayer3_maxwidth=0.102 midlayer3_prefwidth=0.102 midlayer4_minwidth=0.102 midlayer4_maxwidth=0.102 midlayer4_prefwidth=0.102 bottomlayer_minwidth=0.102 bottomlayer_maxwidth=0.102 bottomlayer_prefwidth=0.102 maxuncoupledlength=12.7 // 100ohm
DiffPairsRouting [All] p8: maxlimit=0.254 minlimit=0.254 mostfreqgap=0.254 toplayer_minwidth=0.102 toplayer_maxwidth=0.381 toplayer_prefwidth=0.381 midlayer1_minwidth=0.102 midlayer1_maxwidth=0.381 midlayer1_prefwidth=0.381 midlayer2_minwidth=0.102 midlayer2_maxwidth=0.381 midlayer2_prefwidth=0.381 midlayer3_minwidth=0.102 midlayer3_maxwidth=0.381 midlayer3_prefwidth=0.381 midlayer4_minwidth=0.102 midlayer4_maxwidth=0.381 midlayer4_prefwidth=0.381 bottomlayer_minwidth=0.102 bottomlayer_maxwidth=0.381 bottomlayer_prefwidth=0.381 maxuncoupledlength=12.7
HoleToHoleClearance [All] p1: gap=0.1 allowstackedmicrovias=TRUE
MinimumSolderMaskSliver [All] p1: minsoldermaskwidth=0.1
PlaneConnect [All] p1: planeconnectstyle=Direct reliefexpansion=0.508 reliefentries=4 reliefconductorwidth=0.254 reliefairgap=0.254
PolygonConnect [All] p1: connectstyle=Direct reliefconductorwidth=0.254 reliefentries=4 polygonreliefangle="90 Angle" airgapwidth=0.254
RoutingVias [All] p1: holewidth=0.203 width=0.457 viastyle="Through Hole" minholewidth=0.203 minwidth=0.457 maxholewidth=0.203 maxwidth=0.457
SilkToSilkClearance [All] p1: silktosilkclearance=0.1
SilkToSolderMaskClearance [IsPad] p1: minsilkscreentomaskgap=0.1 clearancetoexposedcopper=TRUE
SolderMaskExpansion [All] p1: expansion=0.102 istentingtop=FALSE
SupplyNets "Schematic Supply Nets_23" [InNet('HDMI_5V')] p1: voltage=0.000
SupplyNets "Schematic Supply Nets_22" [InNet('GND')] p2: voltage=0.000
SupplyNets "Schematic Supply Nets_21" [InNet('RTC_VIO')] p3: voltage=0.000
SupplyNets "Schematic Supply Nets_20" [InNet('VDD_CPU')] p4: voltage=0.000
SupplyNets "Schematic Supply Nets_19" [InNet('BLDO3')] p5: voltage=0.000
SupplyNets "Schematic Supply Nets_18" [InNet('USB_VBUS1')] p6: voltage=0.000
SupplyNets "Schematic Supply Nets_17" [InNet('VDD_GPU')] p7: voltage=0.000
SupplyNets "Schematic Supply Nets_16" [InNet('ALDO2')] p8: voltage=0.000
SupplyNets "Schematic Supply Nets_15" [InNet('VCC_DRAM')] p9: voltage=0.000
SupplyNets "Schematic Supply Nets_14" [InNet('PS')] p10: voltage=0.000
SupplyNets "Schematic Supply Nets_13" [InNet('CLDO2')] p11: voltage=0.000
SupplyNets "Schematic Supply Nets_12" [InNet('ALDO1')] p12: voltage=0.000
SupplyNets "Schematic Supply Nets_11" [InNet('VCC18_RTC')] p13: voltage=0.000
SupplyNets "Schematic Supply Nets_10" [InNet('VDD18_LPDDR')] p14: voltage=0.000
SupplyNets "Schematic Supply Nets_9" [InNet('VDD09_HDMI')] p15: voltage=0.000
SupplyNets "Schematic Supply Nets_8" [InNet('ALDO3')] p16: voltage=0.000
SupplyNets "Schematic Supply Nets_7" [InNet('BLDO2')] p17: voltage=0.000
SupplyNets "Schematic Supply Nets_6" [InNet('VCC33_WIFI')] p18: voltage=0.000
SupplyNets "Schematic Supply Nets_5" [InNet('VCC_DCXOIO')] p19: voltage=0.000
SupplyNets "Schematic Supply Nets_4" [InNet('USB_VBUS0')] p20: voltage=0.000
SupplyNets "Schematic Supply Nets_3" [InNet('USB_VBUS3')] p21: voltage=0.000
SupplyNets "Schematic Supply Nets_1" [InNet('VCC_PC')] p22: voltage=0.000
SupplyNets "Schematic Supply Nets" [InNet('BLDO1')] p23: voltage=0.000
Width ddr3_command [InNetClass('ddr3_command')] p1: maxlimit=0.127 minlimit=0.127 preferedwidth=0.127
Width ddr3_1 [InNetClass('ddr3_1')] p2: maxlimit=0.127 minlimit=0.127 preferedwidth=0.127
Width ddr3_0 [InNetClass('ddr3_0')] p3: maxlimit=0.127 minlimit=0.127 preferedwidth=0.127
Width ddr3_3 [InNetClass('ddr3_3')] p4: maxlimit=0.127 minlimit=0.102 preferedwidth=0.127
Width ddr3_2 [InNetClass('ddr3_2')] p5: maxlimit=0.127 minlimit=0.127 preferedwidth=0.127
Width [InNetClass('All Nets')] p6: maxlimit=1.016 minlimit=0.102 preferedwidth=0.127
24 further rules are at their usual default settings.

## Classes and differential pairs
net class pmu: AP_NMI AP_RESET PMU_SCK PMU_SDA PWR_LED PWR_ON
net class gpio: PD21 PL8 PL10 PWM0 S_UART_RX S_UART_TX SPI1_MISO TWIO_SCL TWIO_SDA UART3_RX UART3_TX
net class display: LCD_BL PD15 PD16 PD18 SPI1_CLK SPI1_CS SPI1_MOSI
net class wifi: AP_CK32KO AP_WAKE_BT BT_PCM_CLK BT_PCM_DIN BT_PCM_DOUT BT_PCM_SYNC BT_REG_ON BT_UART_CTS BT_UART_RTS BT_UART_RX BT_UART_TX BT_WAKE_AP WIFI_CLK_IN WIFI_CLK_OUT WIFI_PWR_EN WL_REG_ON WL_SDIO_CLK WL_SDIO_CMD WL_SDIO_D0 WL_SDIO_D1 WL_SDIO_D2 WL_SDIO_D3 WL_WAKE_AP
net class audio: LINEOUTL LINEOUTR
net class usb: HOST3_N HOST3_P USB0_N USB0_P USB1_AP_SSTX_N USB1_AP_SSTX_P USB1_N USB1_P USB1_SSRX_N USB1_SSRX_P USB1_SSTX_N USB1_SSTX_P
net class hdmi: DDC_CEC_EN HCEC HDMI_CEC HDMI_SCL HDMI_SDA HHPD HSCL HSDA HTX0_N HTX0_P HTX1_N HTX1_P HTX2_N HTX2_P HTXC_N HTXC_P
differential pair class 100ohm: HTX0 HTX1 HTX2 HTXC
differential pair class 90ohm: HOST3 USB0 USB1 USB1_AP_SSTX USB1_SSRX USB1_SSTX
net class emmc: EMMC_CLK EMMC_CMD EMMC_D0 EMMC_D1 EMMC_D2 EMMC_D3 EMMC_D4 EMMC_D5 EMMC_D6 EMMC_D7 EMMC_DS EMMC_RST
net class sdcard: SDC0_CLK SDC0_CMD SDC0_D0 SDC0_D1 SDC0_D2 SDC0_D3 SDC0_DET
net class power: AC_AVCC AC_VDD_IN ALDO1 ALDO2 ALDO3 BLDO1 BLDO2 BLDO3 CLDO2 PS VCC_DRAM VDD09_HDMI VDD18_LPDDR VDD_CPU VDD_CPUFB VDD_GPU VDD_GPUFB
net class ddr3_command: SA0 SA1 SA2 SA3 SA4 SA5 SA6 SA7 SA8 SA9 SCK_N SCK_P SCKE0 SCKE1 SCS0 SCS1 SODT0
net class ddr3_3: SDQ24 SDQ25 SDQ26 SDQ27 SDQ28 SDQ29 SDQ30 SDQ31 SDQM3 SDQS3_N SDQS3_P
net class ddr3_2: SDQ16 SDQ17 SDQ18 SDQ19 SDQ20 SDQ21 SDQ22 SDQ23 SDQM2 SDQS2_N SDQS2_P
net class ddr3_1: SDQ8 SDQ9 SDQ10 SDQ11 SDQ12 SDQ13 SDQ14 SDQ15 SDQM1 SDQS1_N SDQS1_P
net class ddr3_0: SDQ0 SDQ1 SDQ2 SDQ3 SDQ4 SDQ5 SDQ6 SDQ7 SDQM0 SDQS0_N SDQS0_P
component class Wi-Fi: C37 C38 C39 C40 C41 C42 C88 C89 C90 C91 C92 C93 C94 C95 C96 JP1 L1 L7 R18 R19 R20 R21 R22 R23 R24 R25 R26 R27 R28 R29 R30 R31 R32 R65 R66 R67 R68 R69 U6 U30 U31 X1
component class TF-USB: C81 C82 C83 C84 C85 C86 C87 D6 R52 R53 R54 R55 R56 R57 R58 R59 R60 R61 R62 R63 R64 U5 U13 U14 U15 U16 U17 U18 U19 U20 U21 U22 U23 U24 U25 U26 U27 U28 U29 USB1 USB2
component class SoC_2: C44 C45 C101 C102 C103 C104 C105 C106 C107 C108 C109 C110 C111 C112 C113 C114 C115 C116 C117 C118 C119 C120 C121 C122 C123 C124 C125 C126 C127 C128 C129 C130 C131 C132 C133 C134 C135 C136 C137 C138 C139 C140 C141 C142 C143 C144 C145 C146 C147 C148 C149 C150 C151 C152 C153 R72 R73 R74 R75 R76 R77 R78 R79 R80 R81 U32 X2 X3
component class SoC_1: C43 C97 C98 C99 C100 R33 R34 R35 R36 R70 R71
component class Power: C52 C53 C54 C55 C56 C57 C58 C59 C60 C61 C62 C63 C64 C65 C66 C67 C68 C69 C70 C71 C72 C73 C74 C76 C77 C78 C79 C80 D5 L2 L3 L4 L5 L6 R39 R40 R41 R42 R43 R44 R45 R46 R47 R48 R49 R50 R51 U4 USB-
component class LPDDR3: C1 C2 C3 C4 C5 C6 C7 C8 C9 C10 C11 C12 C13 C14 C15 C16 C17 C18 C19 C20 C21 C22 C23 C24 C25 C26 C27 C28 C29 C30 C31 C32 R1 R2 R3 R4 R5 R6 R7 U2
component class GPIO: C75 C154 C155 C156 C157 H2 LCD1 PWR Q4 Q5 R82 R83 R84 R85 R86 R87 R88 R89 R90 R91 R92 R93 R94 STATUS SW1 SW2 SW3 SW4 U12 U33 U34 U35
component class eMMC: C46 C47 C48 C49 C50 C51 R37 R38 U3
component class Audio-HDMI: AUDIO1 C33 C34 C35 C36 CN1 D1 D2 D3 D4 Q1 Q2 Q3 R8 R9 R10 R11 R12 R13 R14 R15 R16 R17 U7 U8 U9 U10 U11
differential pair USB1: +USB1_P -USB1_N
differential pair USB1_SSTX: +USB1_SSTX_P -USB1_SSTX_N
differential pair USB1_SSRX: +USB1_SSRX_P -USB1_SSRX_N
differential pair USB1_AP_SSTX: +USB1_AP_SSTX_P -USB1_AP_SSTX_N
differential pair USB0: +USB0_P -USB0_N
differential pair SDQS3: +SDQS3_P -SDQS3_N
differential pair SDQS2: +SDQS2_P -SDQS2_N
differential pair SDQS1: +SDQS1_P -SDQS1_N
differential pair SDQS0: +SDQS0_P -SDQS0_N
differential pair SCK: +SCK_P -SCK_N
differential pair HTXC: +HTXC_P -HTXC_N
differential pair HTX2: +HTX2_P -HTX2_N
differential pair HTX1: +HTX1_P -HTX1_N
differential pair HTX0: +HTX0_P -HTX0_N
differential pair HOST3: +HOST3_P -HOST3_N

## Components (designator, comment, footprint, x,y, rotation, side; value= is the part's Value field where it differs from the comment)
AUDIO1 "PJ-327C-4A" AUDIO-SMD_PJ-327C-4A 95.123,93.345 r0 top
C1 "10uF" C0603 62.387,30.532 r0 top
C2 "1uF" C0402 62.41,29.287 r0 top
C3 "1uF" C0402 46.681,28.354 r0 bottom
C4 "1uF" C0402 46.681,26.922 r0 top
C5 "100nF" C0402 46.681,29.285 r0 top
C6 "100nF" C0402 50.546,26.924 r0 bottom
C7 "100nF" C0402 57.098,26.944 r180 bottom
C8 "100nF" C0402 55.423,32.819 r270 bottom
C9 "100nF" C0402 50.493,26.929 r0 top
C10 "100nF" C0402 56.778,32.427 r90 bottom
C11 "100nF" C0402 59.33,33.839 r45 bottom
C12 "100nF" C0402 57.125,26.922 r180 top
C13 "NC-100nF" C0402 55.245,24.892 r90 bottom
C14 "NC-10uF" C0603 43.307,34.99 r270 bottom
C15 "NC-1uF" C0402 59.994,26.923 r0 top
C16 "NC-100nF" C0402 59.929,26.922 r0 bottom
C17 "100nF" C0402 55.245,24.892 r90 top
C18 "100nF" C0402 63.566,53.147 r180 bottom
C19 "1uF" C0402 46.654,31.443 r0 top
C20 "100nF" C0402 62.375,32.004 r180 top
C21 "100nF" C0402 50.981,52.235 r225 bottom
C22 "10uF" C0603 41.91,46.948 r90 top
C23 "1uF" C0402 41.714,49.511 r45 bottom
C24 "1uF" C0402 44.196,52.832 r225 bottom
C25 "100nF" C0402 55.652,53.008 r270 bottom
C26 "100nF" C0402 54.895,53.008 r270 bottom
C27 "NC-10uF" C0603 42.042,51.367 r45 bottom
C28 "NC-1uF" C0402 42.988,48.825 r90 bottom
C29 "NC-100nF" C0402 57.143,53.008 r270 bottom
C30 "NC-100nF" C0402 56.437,53.008 r270 bottom
C31 "100nF" C0402 52.943,25.434 r0 top
C32 "100nF" C0402 53.523,40.183 r0 top
C33 "4.7uF" C0402 96.266,83.73 r270 top
C34 "4.7uF" C0402 94.035,83.81 r270 top
C35 "100nF" C0402 84.606,86.98 r270 top
C36 "100nF" C0402 82.884,83.566 r90 top
C37 "10pF" C0402 14.033,10.539 r0 top
C38 "10uF" C0603 24.381,15.642 r90 top
C39 "4.7uF" C0402 30.897,36.304 r90 top
C40 "4.7uF" C0402 30.536,30.273 r90 top
C41 "20pF" C0402 29.696,17.642 r0 top
C42 "20pF" C0402 26.97,17.653 r0 top
C43 "NC-100nF" C0402 65.23,54.821 r90 bottom
C44 "100nF" C0402 56.362,65.177 r270 top
C45 "100nF" C0402 57.353,65.177 r270 top
C46 "100nF" C0402 88.497,48.902 r90 bottom
C47 "2.2uF" C0402 89.506,48.911 r90 bottom
C48 "100nF" C0402 91.526,55.98 r0 bottom
C49 "100nF" C0402 93.387,55.009 r90 bottom
C50 "100nF" C0402 95.189,51.776 r180 bottom
C51 "100nF" C0402 88.542,55.374 r0 bottom
C52 "22uF" C0603 18.556,70.173 r180 top
C53 "10uF" C0603 18.54,71.902 r180 top
C54 "100nF" C0402 18.396,68.716 r180 top
C55 "10uF" C0603 19.789,54.618 r180 bottom
C56 "10uF" C0603 10.541,55.753 r90 top
C57 "1nF" C0402 29.003,46.944 r180 top
C58 "10uF" C0603 23.509,55.835 r90 bottom
C59 "4.7uF" C0402 33.274,56.134 r0 top
C60 "1uF" C0402 27.051,59.817 r270 top
C61 "10uF" C0603 14.478,63.373 r270 top
C62 "10uF" C0603 19.789,51.675 r180 bottom
C63 "10uF" C0603 10.541,49.855 r90 top
C64 "10uF" C0603 25.008,55.817 r90 bottom
C65 "10uF" C0603 28.929,56.892 r180 top
C66 "10uF" C0603 24.552,60.192 r270 top
C67 "10uF" C0603 22.938,60.164 r270 top
C68 "10uF" C0603 22.012,49.51 r270 bottom
C69 "10uF" C0603 19.696,41.554 r0 top
C70 "10uF" C0603 25.266,49.439 r270 bottom
C71 "10uF" C0603 20.696,49.507 r270 bottom
C72 "4.7uF" C0402 16.107,46.786 r90 top
C73 "4.7uF" C0402 14.752,46.77 r90 top
C74 "4.7uF" C0402 17.399,46.773 r90 top
C75 "100nF" C0402 91.313,11.557 r90 top
C76 "10uF" C0603 25.405,41.554 r180 top
C77 "10uF" C0603 25.828,51.6 r0 bottom
C78 "10uF" C0603 29.594,50.792 r180 top
C79 "10uF" C0603 29.583,52.443 r180 top
C80 "10uF" C0603 29.563,49.175 r180 top
C81 "100nF" C0402 36.924,86.499 r180 top
C82 "10uF" C0603 36.836,84.977 r180 top
C83 "10uF" C0603 22.938,78.434 r90 top
C84 "100nF" C0402 48.028,82.551 r0 top
C85 "10uF" C0603 47.897,83.784 r0 top
C86 "100nF" C0402 62.655,82.404 r0 top
C87 "10uF" C0603 62.611,83.671 r0 top
C88 "22pF" C0402 36.11,16.664 r180 top
C89 "1uF" C0402 37.982,11.876 r270 top
C90 "100nF" C0402 40.969,19.05 r0 top
C91 "10uF" C0603 40.941,17.653 r0 top
C92 "100nF" C0402 46.218,6.639 r90 top
C93 "10uF" C0603 47.796,6.55 r90 top
C94 "4.7uF" C0402 25.363,7.112 r0 top
C95 "100nF" C0402 25.363,8.128 r0 top
C96 "100nF" C0402 29.695,4.938 r0 top
C97 "100nF" C0402 61.335,55.007 r180 bottom
C98 "100nF" C0402 44.34,56.594 r0 bottom
C99 "100nF" C0402 72.669,61.31 r180 top
C100 "100nF" C0402 76.829,59.816 r270 bottom
C101 "1uF" C0402 66.064,63.231 r45 bottom
C102 "1nF" C0402 75.559,57.063 r180 top
C103 "1nF" C0402 73.453,59.368 r270 top
C104 "4.7uF" C0402 75,57.303 r270 bottom
C105 "1uF" C0402 76.13,57.333 r270 bottom
C106 "100nF" C0402 75.492,54.858 r90 bottom
C107 "10uF" C0603 32.562,46.295 r270 bottom
C108 "10uF" C0603 32.517,46.236 r270 top
C109 "1uF" C0402 30.842,46.282 r270 bottom
C110 "1uF" C0402 31.115,46.228 r270 top
C111 "100nF" C0402 56.62,57.989 r180 bottom
C112 "100nF" C0402 55.847,56.674 r90 bottom
C113 "22uF" C0603 35.206,60.275 r270 top
C114 "10uF" C0603 36.624,60.302 r270 top
C115 "1uF" C0402 37.868,60.154 r270 top
C116 "1uF" C0402 38.839,60.169 r270 top
C117 "100nF" C0402 57.884,56.273 r270 bottom
C118 "100nF" C0402 57.301,54.65 r0 bottom
C119 "22uF" C0603 39.243,54.991 r0 bottom
C120 "10uF" C0603 39.243,54.991 r0 top
C121 "1uF" C0402 52.747,56.269 r270 bottom
C122 "1uF" C0402 51.054,54.61 r0 bottom
C123 "100nF" C0402 53.504,54.61 r180 bottom
C124 "100nF" C0402 51.816,56.261 r270 bottom
C125 "12pF" C0402 67.2,67.387 r0 top
C126 "100nF" C0402 61.565,65.118 r270 bottom
C127 "220nF" C0402 63.143,61.631 r45 bottom
C128 "12pF" C0402 64.008,63.5 r90 top
C129 "1uF" C0402 41.864,56.568 r0 top
C130 "100nF" C0402 47.842,52.832 r180 bottom
C131 "1nF" C0402 61.717,64.505 r270 top
C132 "10uF" C0603 44.293,62.012 r0 bottom
C133 "100nF" C0402 44.34,60.745 r0 bottom
C134 "100nF" C0402 47.634,66.078 r270 bottom
C135 "10uF" C0603 48.879,66.066 r270 bottom
C136 "4.7uF" C0402 51.087,66.102 r270 bottom
C137 "4.7uF" C0402 50.051,66.079 r270 bottom
C138 "1uF" C0402 48.971,64.779 r270 top
C139 "7pF" C0402 64.135,60.579 r90 top
C140 "7pF" C0402 64.124,58.237 r270 top
C141 "100nF" C0402 44.305,63.308 r0 bottom
C142 "100nF" C0402 72.662,63.819 r180 top
C143 "100nF" C0402 35.814,54.483 r90 top
C144 "100nF" C0402 54.479,58.177 r0 bottom
C145 "100nF" C0402 47.967,64.756 r270 top
C146 "1uF" C0402 54.014,55.906 r90 bottom
C147 "100nF" C0402 54.991,55.88 r90 bottom
C148 "100nF" C0402 72.687,65.076 r180 top
C149 "100nF" C0402 72.676,62.554 r180 top
C150 "100nF" C0402 54.512,57.316 r0 bottom
C151 "100nF" C0402 41.799,56.6 r0 bottom
C152 "1uF" C0402 61.327,52.917 r180 bottom
C153 "100nF" C0402 61.319,53.978 r180 bottom
C154 "100nF" C0402 86.487,29.337 r0 top
C155 "100nF" C0402 78.105,29.464 r0 top
C156 "100nF" C0402 101.981,29.337 r0 top
C157 "470nF" C0402 94.451,29.21 r0 top
CN1 "KH-HDMI-19P-Cu" HDMI-SMD_KH-HDMI-19P-CU 76.327,93.98 r180 top
D1 "AZ1045-04F.R7G" DFN2510-10_L2.5-W1.0-P0.50-BL 72.576,86.472 r0 top
D2 "AZ1045-04F.R7G" DFN2510-10_L2.5-W1.0-P0.50-BL 76.026,86.651 r0 top
D3 "1N5819WS" SOD-323_L1.8-W1.3-LS2.5-RD 74.743,75.03 r270 top
D4 "1N5819WS" SOD-323_L1.8-W1.3-LS2.5-RD 85.463,84.004 r0 top
D5 "SMAJ5.0A" SMA_L4.3-W2.6-LS5.2-RD 19.95,74.42 r0 top
D6 "AZ1045-04F.R7G" DFN2510-10_L2.5-W1.0-P0.50-BL 55.372,82.677 r0 top
H2 "HX PZ2.54-1x3P ZZ" CONN-TH_HX-PZ2.54-1X3P-ZZ 105.156,36.576 r90 top
JP1 "6GHz" RF-SMD_FRF05002-JSS103M 10.785,10.539 r90 top
L1 "4.7uH" IND-SMD_L6.0-W6.0_FNR60XXS 34.661,34.167 r90 top
L2 "1.5uH" IND-SMD_L4.0-W4.0 14.212,56.732 r180 top value=1uH
L3 "1.5uH" IND-SMD_L4.0-W4.0 17.945,61.536 r180 top value=1uH
L4 "1.5uH" IND-SMD_L4.0-W4.0 14.212,52.084 r180 top value=1uH
L5 "1.5uH" IND-SMD_L4.0-W4.0 20.16,44.961 r270 top value=1uH
L6 "1.5uH" IND-SMD_L4.0-W4.0 25.36,44.978 r270 top value=1uH
L7 "4.7uH" IND-SMD_L6.0-W6.0_FNR60XXS 46.675,11.553 r180 top
LCD1 "N099-0416THBIG01-H10" LCD-SMD_10P-P0.70-L44.8-W8.6_N099-0416THBIG01-H10 75.311,9.906 r270 top
PWR "KT-0603R" LED0603-RD 91.943,35.799 r180 top (schematic designator LED1)
Q1 "BSN20" SOT-23-3_L2.9-W1.6-P1.90-LS2.8-BR 81.783,76.882 r270 top
Q2 "BSN20" SOT-23-3_L2.9-W1.6-P1.90-LS2.8-BR 86.44,76.907 r270 top
Q3 "BSN20" SOT-23-3_L2.9-W1.6-P1.90-LS2.8-BR 77.206,77.337 r270 top
Q4 "BSN20" SOT-23-3_L2.9-W1.6-P1.90-LS2.8-BR 100.326,37.606 r90 top
Q5 "Si2302CDS-T1-GE3" SOT-23_L2.9-W1.3-P1.90-LS2.4-BR 55.118,14.986 r90 top
R1 "240Ω" R0402 46.666,30.335 r0 top
R2 "240Ω" R0402 43.444,47.819 r90 top
R3 "2kΩ" R0402 52.964,23.349 r180 top
R4 "1.5kΩ" R0402 54.762,40.949 r315 top
R5 "100Ω" R0402 54.538,26.95 r180 bottom
R6 "2kΩ" R0402 52.958,24.386 r0 top
R7 "2kΩ" R0402 53.614,41.952 r270 top
R8 "0Ω" R0402 96.712,85.865 r180 top
R9 "0Ω" R0402 93.594,85.865 r0 top
R10 "10kΩ" R0402 81.472,74.006 r180 top
R11 "1.8kΩ" R0402 82.219,79.659 r0 top
R12 "0Ω" R0402 77.283,71.317 r0 top
R13 "10kΩ" R0402 86.352,73.896 r180 top
R14 "1.8kΩ" R0402 85.985,79.659 r180 top
R15 "10kΩ" R0402 83.185,86.868 r90 top
R16 "56kΩ" R0402 76.855,73.889 r180 top
R17 "56kΩ" R0402 74.743,78.179 r270 top
R18 "10kΩ" R0402 12.107,21.207 r180 top
R19 "10kΩ" R0402 12.107,22.223 r180 top
R20 "10kΩ" R0402 12.107,23.62 r180 top
R21 "10kΩ" R0402 12.107,24.89 r180 top
R22 "100kΩ" R0402 32.323,21.842 r180 top
R23 "0Ω" R0402 12.107,30.768 r180 top
R24 "10kΩ" R0402 32.271,28.091 r180 top
R25 "10kΩ" R0402 32.271,26.922 r180 top
R26 "10kΩ" R0402 32.271,25.779 r180 top
R27 "10kΩ" R0402 32.271,24.636 r180 top
R28 "10kΩ" R0402 32.271,23.493 r180 top
R29 "0Ω" R0402 26.356,34.466 r90 top
R30 "10kΩ" R0402 27.5,34.431 r90 top
R31 "NC-100kΩ" R0402 22.587,15.813 r90 top
R32 "NC-100kΩ" R0402 12.13,32.002 r180 top
R33 "33Ω" R0402 45.805,59.603 r90 top
R34 "33Ω" R0402 64.5,55.85 r180 top
R35 "33Ω" R0402 45.828,56.594 r270 top
R36 "33Ω" R0402 65.28,50.663 r180 top
R37 "10kΩ" R0402 98.773,51.81 r90 top
R38 "10kΩ" R0402 91.806,46.931 r180 top
R39 "0Ω" R0402 33.257,58.676 r0 top
R40 "5.1kΩ" R0402 11.89,78.486 r180 top
R41 "5.1kΩ" R0402 9.105,78.486 r180 top
R42 "0Ω" R0402 33.243,57.658 r180 top
R43 "2kΩ" R0402 31.392,47.879 r180 top
R44 "2kΩ" R0402 33.274,53.848 r0 top
R45 "2kΩ" R0402 33.274,52.705 r0 top
R46 "0Ω" R0402 33.284,54.982 r180 top
R47 "NC-0Ω" R0402 28.791,58.162 r180 top
R48 "NC-0Ω" R0402 33.267,50.45 r180 top
R49 "0Ω" R0402 14.752,42.667 r270 top
R50 "NC-0Ω" R0402 17.375,42.684 r90 top
R51 "NC-0Ω" R0402 33.274,51.575 r180 top
R52 "10kΩ" R0402 21.082,78.486 r90 top
R53 "0Ω" R0402 24.604,78.606 r270 top
R54 "NC-10kΩ" R0402 39.624,79.883 r90 top
R55 "6.8kΩ" R0402 34.287,79.526 r90 top
R56 "47kΩ" R0402 30.387,79.618 r270 top
R57 "100kΩ" R0402 36.957,77.724 r0 top
R58 "NC-0Ω" R0402 37.009,82.423 r0 top
R59 "10kΩ" R0402 48.889,76.376 r0 top
R60 "6.8kΩ" R0402 48.415,81.431 r0 top
R61 "NC-0Ω" R0402 51.181,78.74 r270 top
R62 "10kΩ" R0402 63.073,76.284 r0 top
R63 "6.8kΩ" R0402 62.659,81.401 r0 top
R64 "NC-0Ω" R0402 65.555,78.881 r270 top
R65 "33kΩ" R0402 36.083,18.027 r180 top
R66 "1kΩ" R0402 36.837,11.779 r270 top
R67 "150kΩ" R0402 36.18,15.367 r180 top
R68 "0Ω" R0402 43.942,6.91 r270 top
R69 "0Ω" R0402 25.363,9.144 r180 top
R70 "1kΩ" R0402 64.234,54.776 r270 bottom
R71 "10kΩ" R0402 63.18,54.786 r90 bottom
R72 "150kΩ" R0402 65.024,64.135 r45 bottom
R73 "10kΩ" R0402 67.183,65.405 r45 bottom
R74 "1kΩ" R0402 59.86,64.495 r180 bottom
R75 "10kΩ" R0402 75.395,59.458 r270 top
R76 "6.04kΩ" R0402 48.006,67.598 r270 top
R77 "2kΩ" R0402 50.981,67.598 r90 top
R78 "2kΩ" R0402 48.986,67.598 r90 top
R79 "10kΩ" R0402 49.992,67.598 r270 top
R80 "0Ω" R0402 64.81,67.395 r180 top
R81 "10MΩ" R0402 62.995,59.462 r90 top
R82 "2kΩ" R0402 95.123,11.884 r90 top
R83 "2kΩ" R0402 95.123,8.307 r270 top
R84 "0Ω" R0402 100.659,34.036 r0 top
R85 "10kΩ" R0402 100.326,40.47 r0 top
R86 "1kΩ" R0402 86.566,30.745 r180 top
R87 "1kΩ" R0402 78.156,30.756 r180 top
R88 "1kΩ" R0402 102.108,30.734 r180 top
R89 "1kΩ" R0402 94.563,31.75 r180 top
R90 "2kΩ" R0402 88.66,35.799 r0 top
R91 "2kΩ" R0402 88.66,38.725 r0 top
R92 "10Ω" R0402 55.499,12.192 r0 top
R93 "1kΩ" R0402 55.118,19.304 r180 top
R94 "10kΩ" R0402 55.17,18.034 r180 top
STATUS "KT-0603G" LED0603-GR 91.943,38.657 r180 top (schematic designator LED2)
SW1 "TS-1088-AR02016" SW-SMD_L3.9-W3.0-P4.45 86.317,26.565 r0 top
SW2 "TS-1088-AR02016" SW-SMD_L3.9-W3.0-P4.45 77.827,26.565 r0 top
SW3 "TS-1088-AR02016" SW-SMD_L3.9-W3.0-P4.45 101.854,26.67 r0 top
SW4 "TS-1088-AR02016" SW-SMD_L3.9-W3.0-P4.45 94.21,26.565 r0 top
U1 "LPDDR3-2G" FBGA-178_L11.5-W11.0_K4E6E304EC-TL 54.479,33.576 r90 top
U2 "Allwinner_H6" BGA451_ALLWINNER_H6 54.453,55.432 r0 top
U3 "KLM8G1GETF-B041" FBGA-153_L13.0-W11.5-P0.50_KLMAG1JETD-B041 91.2,54.021 r90 top
U4 "AXP805" QFN-56_L7.0-W7.0-P0.40-TL-EP4.6 22.733,52.959 r90 top
U5 "TF-01A_C91145" TF-SMD_TF-01A 23.635,91.56 r180 top
U6 "2.4GHz" QFN-44_L12.0-W12.0-P0.90-TL_AP6212 22.587,26.288 r90 top
U7 "ESD5451N" DFN1006-2L-BI 81.882,83.566 r90 top
U8 "ESD5451N" DFN1006-2L-BI 82.092,86.901 r90 top
U9 "ESD5451N" DFN1006-2L-BI 80.396,87.005 r90 top
U10 "ESD5451N" DFN1006-2L-BI 79.252,87.017 r90 top
U11 "ESD5451N" DFN1006-2L-BI 78.086,87.017 r90 top
U12 "HX PZ2.54-1x6P ZZ" HDR-TH_6P-P2.54-V-M 104.648,15.113 r90 top
U13 "SY6280AAC" SOT-23-5_L3.0-W1.7-P0.95-LS2.8-BL 36.957,80.01 r270 top
U14 "ESD5451N" DFN1006-2L-BI 41.24,85.613 r180 top
U15 "ESD5451N" DFN1006-2L-BI 39.542,85.598 r0 top
U16 "ESD5451N" DFN1006-2L-BI 28.08,83.222 r90 top
U17 "ESD5451N" DFN1006-2L-BI 29.223,83.222 r90 top
U18 "ESD5451N" DFN1006-2L-BI 21.349,83.222 r90 top
U19 "ESD5451N" DFN1006-2L-BI 22.492,83.222 r90 top
U20 "ESD5451N" DFN1006-2L-BI 23.762,83.222 r90 top
U21 "ESD5451N" DFN1006-2L-BI 25.826,83.222 r90 top
U22 "ESD5451N" DFN1006-2L-BI 30.263,83.222 r90 top
U23 "ESD5451N" DFN1006-2L-BI 24.755,83.222 r90 top
U24 "ESD5451N" DFN1006-2L-BI 52.661,83.566 r180 top
U25 "ESD5451N" DFN1006-2L-BI 51.082,83.566 r0 top
U26 "SY6280AAC" SOT-23-5_L3.0-W1.7-P0.95-LS2.8-BL 48.899,78.882 r180 top
U27 "ESD5451N" DFN1006-2L-BI 59.746,83.566 r180 top
U28 "ESD5451N" DFN1006-2L-BI 58.142,83.566 r0 top
U29 "SY6280AAC" SOT-23-5_L3.0-W1.7-P0.95-LS2.8-BL 63.119,78.867 r180 top
U30 "SY8089A1AAC" TSOT-23-5_L2.9-W1.6-P0.95-LS2.8-BR 40.498,12.573 r270 top
U31 "ME6212C18M5G" SOT-23-5_L3.0-W1.7-P0.95-LS2.8-BL 29.337,8.128 r0 top
U32 "ESD5451N" DFN1006-2L-BI 74.422,59.436 r270 top
U33 "HX PZ2.54-1x6P ZZ" HDR-TH_6P-P2.54-V-M 97.916,15.113 r90 top
U34 "HX PZ2.54-1x6P ZZ" HDR-TH_6P-P2.54-V-M 101.29,15.113 r90 top
U35 "ESD5451N" DFN1006-2L-BI 94.488,30.607 r0 top
USB1 "USB-303WSD-BRY" USB-A-TH_XUNPU_USB-303WSD-BRY 55.073,89.519 r180 top
USB2 "906-162A1011D10200" USB-A-TH_4P-P1.40-V-F-C39416 40.098,93.082 r180 top
USBC1 "MC-312D" USB-C-SMD_MC-312D-C 11.134,71.988 r270 top
X1 "26MHz" CRYSTAL-SMD_4P-L3.2-W2.5-BL 28.172,15.229 r0 top
X2 "24MHz" CRYSTAL-SMD_4P-L3.2-W2.5-BL 66.667,64.876 r0 top
X3 "32.768kHz" MC-146_4P-L6.7-W1.5-P0.85-TL 68.549,59.392 r0 top

## Footprints (in the part's own frame and the unit in brackets; to place one, negate y for a bottom-side part, rotate by r counter-clockwise, add the part's x,y. Pads: shape width x height; smd on the part's side, far side on the other; paste and mask are expansions set on the pad)
AUDIO-SMD_PJ-327C-4A [mm]
  rect 2.8x1.8 smd: 1(-3.4,4.275) 2(-3.4,-2.625)
  rect 2.5x1.8 smd: 3(3.4,1.525)
  rect 3x1.8 smd: 4(3.4,-4.275)
  Keep-Out Layer board cut-out: 0.75,3.825 0.75,3.726 0.699,3.536 0.6,3.365 0.461,3.225 0.289,3.126 0.099,3.075 -0.099,3.075 -0.289,3.126 -0.461,3.225 -0.6,3.365 -0.699,3.536 -0.75,3.726 -0.75,3.825 -0.75,3.924 -0.699,4.115 -0.6,4.286 -0.461,4.425 -0.289,4.524 -0.099,4.575 0.099,4.575 0.289,4.524 0.461,4.425 0.6,4.286 0.699,4.115 0.75,3.924 0.75,3.825 0.75,3.825
  Keep-Out Layer board cut-out: 0.75,-2.175 0.75,-2.274 0.699,-2.465 0.6,-2.636 0.461,-2.775 0.289,-2.874 0.099,-2.925 -0.099,-2.925 -0.289,-2.874 -0.461,-2.775 -0.6,-2.636 -0.699,-2.465 -0.75,-2.274 -0.75,-2.175 -0.75,-2.076 -0.699,-1.886 -0.6,-1.715 -0.461,-1.575 -0.289,-1.476 -0.099,-1.425 0.099,-1.425 0.289,-1.476 0.461,-1.575 0.6,-1.715 0.699,-1.886 0.75,-2.076 0.75,-2.175 0.75,-2.175
  Keep-Out Layer circle w0.025: c0,3.825 r0.75
  Keep-Out Layer circle w0.025: c0,-2.175 r0.75
  Keep-Out Layer region: 0.75,3.825 0.75,3.726 0.699,3.536 0.6,3.365 0.461,3.225 0.289,3.126 0.099,3.075 -0.099,3.075 -0.289,3.126 -0.461,3.225 -0.6,3.365 -0.699,3.536 -0.75,3.726 -0.75,3.825 -0.75,3.924 -0.699,4.115 -0.6,4.286 -0.461,4.425 -0.289,4.524 -0.099,4.575 0.099,4.575 0.289,4.524 0.461,4.425 0.6,4.286 0.699,4.115 0.75,3.924 0.75,3.825 0.75,3.825
  Keep-Out Layer region: 0.75,-2.175 0.75,-2.274 0.699,-2.465 0.6,-2.636 0.461,-2.775 0.289,-2.874 0.099,-2.925 -0.099,-2.925 -0.289,-2.874 -0.461,-2.775 -0.6,-2.636 -0.699,-2.465 -0.75,-2.274 -0.75,-2.175 -0.75,-2.076 -0.699,-1.886 -0.6,-1.715 -0.461,-1.575 -0.289,-1.476 -0.099,-1.425 0.099,-1.425 0.289,-1.476 0.461,-1.575 0.6,-1.715 0.699,-1.886 0.75,-2.076 0.75,-2.175 0.75,-2.175
  silkscreen extent -3.2,-5.67 3.2,8.91, body extent -4.34,-5.53 4.16,8.77, height 4.83
BGA451_ALLWINNER_H6 [mm]
  round 0.28 smd paste-100 mask+0.051: A1(-7.15,7.15) A3(-5.85,7.15) A5(-4.55,7.15) A6(-3.9,7.15) A8(-2.6,7.15) A9(-1.95,7.15) A10(-1.3,7.15) A12(0,7.15) A13(0.65,7.15) A14(1.3,7.15) A16(2.6,7.15) A17(3.25,7.15) A18(3.9,7.15) A19(4.55,7.15) A20(5.2,7.15) A21(5.85,7.15) A22(6.5,7.15) A23(7.15,7.15) AA1(-7.15,-5.85) AA2(-6.5,-5.85) AA3(-5.85,-5.85) AA4(-5.2,-5.85) AA5(-4.55,-5.85) AA7(-3.25,-5.85) AA8(-2.6,-5.85) AA10(-1.3,-5.85) AA11(-0.65,-5.85) AA13(0.65,-5.85) AA14(1.3,-5.85) AA15(1.95,-5.85) AA16(2.6,-5.85) AA17(3.25,-5.85) AA19(4.55,-5.85) AA20(5.2,-5.85) AA21(5.85,-5.85) AA22(6.5,-5.85) AA23(7.15,-5.85) AB1(-7.15,-6.5) AB2(-6.5,-6.5) AB3(-5.85,-6.5) AB4(-5.2,-6.5) AB5(-4.55,-6.5) AB6(-3.9,-6.5) AB7(-3.25,-6.5) AB8(-2.6,-6.5) AB9(-1.95,-6.5) AB10(-1.3,-6.5) AB11(-0.65,-6.5) AB12(0,-6.5) AB13(0.65,-6.5) AB14(1.3,-6.5) AB15(1.95,-6.5) AB16(2.6,-6.5) AB17(3.25,-6.5) AB18(3.9,-6.5) AB19(4.55,-6.5) AB20(5.2,-6.5) AB21(5.85,-6.5) AB22(6.5,-6.5) AB23(7.15,-6.5) AC1(-7.15,-7.15) AC2(-6.5,-7.15) AC3(-5.85,-7.15) AC4(-5.2,-7.15) AC5(-4.55,-7.15) AC6(-3.9,-7.15) AC7(-3.25,-7.15) AC8(-2.6,-7.15) AC9(-1.95,-7.15) AC10(-1.3,-7.15) AC11(-0.65,-7.15) AC12(0,-7.15) AC13(0.65,-7.15) AC14(1.3,-7.15) AC15(1.95,-7.15) AC16(2.6,-7.15) AC17(3.25,-7.15) AC18(3.9,-7.15) AC19(4.55,-7.15) AC20(5.2,-7.15) AC21(5.85,-7.15) AC22(6.5,-7.15) AC23(7.15,-7.15) B1(-7.15,6.5) B2(-6.5,6.5) B3(-5.85,6.5) B4(-5.2,6.5) B5(-4.55,6.5) B6(-3.9,6.5) B7(-3.25,6.5) B8(-2.6,6.5) B9(-1.95,6.5) B10(-1.3,6.5) B12(0,6.5) B13(0.65,6.5) B14(1.3,6.5) B15(1.95,6.5) B16(2.6,6.5) B17(3.25,6.5) B18(3.9,6.5) B19(4.55,6.5) B20(5.2,6.5) B21(5.85,6.5) B22(6.5,6.5) B23(7.15,6.5) C1(-7.15,5.85) C2(-6.5,5.85) C3(-5.85,5.85) C4(-5.2,5.85) C5(-4.55,5.85) C7(-3.25,5.85) C8(-2.6,5.85) C9(-1.95,5.85) C12(0,5.85) C13(0.65,5.85) C14(1.3,5.85) C15(1.95,5.85) C16(2.6,5.85) C18(3.9,5.85) C19(4.55,5.85) C20(5.2,5.85) C22(6.5,5.85) C23(7.15,5.85) D1(-7.15,5.2) D2(-6.5,5.2) D3(-5.85,5.2) D4(-5.2,5.2) D5(-4.55,5.2) D9(-1.95,5.2) D11(-0.65,5.2) D12(0,5.2) D15(1.95,5.2) D16(2.6,5.2) D18(3.9,5.2) D19(4.55,5.2) D20(5.2,5.2) D21(5.85,5.2) D22(6.5,5.2) D23(7.15,5.2) E1(-7.15,4.55) E2(-6.5,4.55) E3(-5.85,4.55) E4(-5.2,4.55) E5(-4.55,4.55) E6(-3.9,4.55) E7(-3.25,4.55) E8(-2.6,4.55) E9(-1.95,4.55) E10(-1.3,4.55) E11(-0.65,4.55) E12(0,4.55) E13(0.65,4.55) E14(1.3,4.55) E15(1.95,4.55) E16(2.6,4.55) E17(3.25,4.55) E18(3.9,4.55) E19(4.55,4.55) E21(5.85,4.55) E22(6.5,4.55) F1(-7.15,3.9) F2(-6.5,3.9) F3(-5.85,3.9) F5(-4.55,3.9) F7(-3.25,3.9) F8(-2.6,3.9) F9(-1.95,3.9) F11(-0.65,3.9) F12(0,3.9) F13(0.65,3.9) F14(1.3,3.9) F15(1.95,3.9) F16(2.6,3.9) F17(3.25,3.9) F19(4.55,3.9) F20(5.2,3.9) F21(5.85,3.9) F22(6.5,3.9) F23(7.15,3.9) G2(-6.5,3.25) G3(-5.85,3.25) G7(-3.25,3.25) G8(-2.6,3.25) G9(-1.95,3.25) G10(-1.3,3.25) G11(-0.65,3.25) G12(0,3.25) G13(0.65,3.25) G14(1.3,3.25) G15(1.95,3.25) G16(2.6,3.25) G17(3.25,3.25) G20(5.2,3.25) G21(5.85,3.25) G22(6.5,3.25) H1(-7.15,2.6) H2(-6.5,2.6) H3(-5.85,2.6) H4(-5.2,2.6) H5(-4.55,2.6) H6(-3.9,2.6) H7(-3.25,2.6) H8(-2.6,2.6) H9(-1.95,2.6) H10(-1.3,2.6) H11(-0.65,2.6) H12(0,2.6) H13(0.65,2.6) H14(1.3,2.6) H15(1.95,2.6) H16(2.6,2.6) H17(3.25,2.6) H18(3.9,2.6) H19(4.55,2.6) H20(5.2,2.6) H21(5.85,2.6) H22(6.5,2.6) H23(7.15,2.6) J2(-6.5,1.95) J3(-5.85,1.95) J5(-4.55,1.95) J6(-3.9,1.95) J7(-3.25,1.95) J8(-2.6,1.95) J9(-1.95,1.95) J10(-1.3,1.95) J11(-0.65,1.95) J12(0,1.95) J13(0.65,1.95) J14(1.3,1.95) J15(1.95,1.95) J16(2.6,1.95) J17(3.25,1.95) J19(4.55,1.95) J20(5.2,1.95) J21(5.85,1.95) J22(6.5,1.95) K1(-7.15,1.3) K2(-6.5,1.3) K3(-5.85,1.3) K7(-3.25,1.3) K8(-2.6,1.3) K9(-1.95,1.3) K10(-1.3,1.3) K11(-0.65,1.3) K12(0,1.3) K13(0.65,1.3) K14(1.3,1.3) K15(1.95,1.3) K16(2.6,1.3) K17(3.25,1.3) K18(3.9,1.3) K20(5.2,1.3) K21(5.85,1.3) K22(6.5,1.3) K23(7.15,1.3) L2(-6.5,0.65) L3(-5.85,0.65) L4(-5.2,0.65) L5(-4.55,0.65) L6(-3.9,0.65) L7(-3.25,0.65) L8(-2.6,0.65) L9(-1.95,0.65) L10(-1.3,0.65) L11(-0.65,0.65) L12(0,0.65) L13(0.65,0.65) L14(1.3,0.65) L15(1.95,0.65) L16(2.6,0.65) L17(3.25,0.65) L18(3.9,0.65) L19(4.55,0.65) L20(5.2,0.65) L21(5.85,0.65) L22(6.5,0.65) M1(-7.15,0) M2(-6.5,0) M3(-5.85,0) M4(-5.2,0) M5(-4.55,0) M6(-3.9,0) M7(-3.25,0) M8(-2.6,0) M9(-1.95,0) M10(-1.3,0) M11(-0.65,0) M12(0,0) M13(0.65,0) M14(1.3,0) M15(1.95,0) M16(2.6,0) M17(3.25,0) M18(3.9,0) M19(4.55,0) M21(5.85,0) M22(6.5,0) M23(7.15,0) N2(-6.5,-0.65) N3(-5.85,-0.65) N7(-3.25,-0.65) N8(-2.6,-0.65) N9(-1.95,-0.65) N10(-1.3,-0.65) N11(-0.65,-0.65) N12(0,-0.65) N13(0.65,-0.65) N14(1.3,-0.65) N15(1.95,-0.65) N16(2.6,-0.65) N17(3.25,-0.65) N18(3.9,-0.65) N19(4.55,-0.65) N20(5.2,-0.65) N22(6.5,-0.65) N23(7.15,-0.65) P1(-7.15,-1.3) P2(-6.5,-1.3) P3(-5.85,-1.3) P4(-5.2,-1.3) P5(-4.55,-1.3) P6(-3.9,-1.3) P7(-3.25,-1.3) P8(-2.6,-1.3) P9(-1.95,-1.3) P10(-1.3,-1.3) P11(-0.65,-1.3) P12(0,-1.3) P13(0.65,-1.3) P14(1.3,-1.3) P15(1.95,-1.3) P16(2.6,-1.3) P17(3.25,-1.3) P18(3.9,-1.3) P19(4.55,-1.3) P20(5.2,-1.3) P21(5.85,-1.3) P22(6.5,-1.3) R2(-6.5,-1.95) R3(-5.85,-1.95) R5(-4.55,-1.95) R6(-3.9,-1.95) R7(-3.25,-1.95) R8(-2.6,-1.95) R9(-1.95,-1.95) R10(-1.3,-1.95) R11(-0.65,-1.95) R12(0,-1.95) R13(0.65,-1.95) R14(1.3,-1.95) R15(1.95,-1.95) R16(2.6,-1.95) R17(3.25,-1.95) R18(3.9,-1.95) R19(4.55,-1.95) R20(5.2,-1.95) R21(5.85,-1.95) R22(6.5,-1.95) R23(7.15,-1.95) T1(-7.15,-2.6) T2(-6.5,-2.6) T3(-5.85,-2.6) T7(-3.25,-2.6) T8(-2.6,-2.6) T9(-1.95,-2.6) T10(-1.3,-2.6) T11(-0.65,-2.6) T12(0,-2.6) T13(0.65,-2.6) T14(1.3,-2.6) T15(1.95,-2.6) T16(2.6,-2.6) T17(3.25,-2.6) T18(3.9,-2.6) T19(4.55,-2.6) T20(5.2,-2.6) T21(5.85,-2.6) T22(6.5,-2.6) U2(-6.5,-3.25) U3(-5.85,-3.25) U4(-5.2,-3.25) U5(-4.55,-3.25) U6(-3.9,-3.25) U7(-3.25,-3.25) U8(-2.6,-3.25) U9(-1.95,-3.25) U10(-1.3,-3.25) U11(-0.65,-3.25) U12(0,-3.25) U13(0.65,-3.25) U14(1.3,-3.25) U15(1.95,-3.25) U16(2.6,-3.25) U17(3.25,-3.25) U18(3.9,-3.25) U19(4.55,-3.25) U21(5.85,-3.25) U22(6.5,-3.25) U23(7.15,-3.25) V1(-7.15,-3.9) V2(-6.5,-3.9) V3(-5.85,-3.9) V5(-4.55,-3.9) V6(-3.9,-3.9) V7(-3.25,-3.9) V9(-1.95,-3.9) V10(-1.3,-3.9) V11(-0.65,-3.9) V13(0.65,-3.9) V15(1.95,-3.9) V17(3.25,-3.9) V19(4.55,-3.9) V20(5.2,-3.9) V21(5.85,-3.9) V22(6.5,-3.9) V23(7.15,-3.9) W1(-7.15,-4.55) W2(-6.5,-4.55) W3(-5.85,-4.55) W4(-5.2,-4.55) W5(-4.55,-4.55) W7(-3.25,-4.55) W8(-2.6,-4.55) W10(-1.3,-4.55) W11(-0.65,-4.55) W13(0.65,-4.55) W14(1.3,-4.55) W16(2.6,-4.55) W17(3.25,-4.55) W19(4.55,-4.55) W21(5.85,-4.55) W22(6.5,-4.55) W23(7.15,-4.55) Y1(-7.15,-5.2) Y2(-6.5,-5.2) Y3(-5.85,-5.2) Y5(-4.55,-5.2) Y7(-3.25,-5.2) Y8(-2.6,-5.2) Y10(-1.3,-5.2) Y11(-0.65,-5.2) Y13(0.65,-5.2) Y14(1.3,-5.2) Y16(2.6,-5.2) Y17(3.25,-5.2) Y19(4.55,-5.2) Y20(5.2,-5.2) Y21(5.85,-5.2) Y22(6.5,-5.2) Y23(7.15,-5.2)
  silkscreen extent -8,-7.58 7.58,8, body extent -7.51,-7.5 7.49,7.5, height 1.18
C0402 [mm]
  rect 0.79x0.54 smd paste-100 mask+0.051: 1(-0.545,0) 2(0.545,0)
  silkscreen extent -1.17,-0.5 1.17,0.5, body extent -0.5,-0.25 0.5,0.25, height 0.5
C0603 [mm]
  rect 0.8x0.9 smd: 1(-0.7,0) 2(0.7,0)
  silkscreen extent -1.39,-0.71 1.39,0.71, body extent -0.8,-0.4 0.8,0.4, height 0.5
CONN-TH_HX-PZ2.54-1X3P-ZZ [mm]
  rect 1.7x1.7 hole 1.02: 1(-2.54,0)
  round 1.7 hole 1.02: 2(0,0) 3(2.54,0)
  silkscreen extent -3.81,-1.25 3.81,1.4, body extent -3.82,-1.2 3.8,1.34, height 9.63
CRYSTAL-SMD_4P-L3.2-W2.5-BL [mm]
  rect 1.4x1.2 smd: 1(-1.1,-0.85) 2(1.1,-0.85) 3(1.1,0.85) 4(-1.1,0.85)
  silkscreen extent -2.26,-1.91 2.03,1.68, body extent -1.6,-1.38 1.6,1.12, height 1.2
DFN1006-2L-BI [mm]
  rect 0.45x0.55 smd: 1(-0.425,0) 2(0.425,0)
  silkscreen extent -0.8,-0.4 0.8,0.4, body extent -0.5,-0.29 0.5,0.31, height 0.32
DFN2510-10_L2.5-W1.0-P0.50-BL [mm]
  rect 0.2x0.665 smd paste-100 mask+0.051: 1(-1,-0.433) 2(-0.5,-0.433) 4(0.5,-0.433) 5(1,-0.433) 6(1,0.433) 7(0.5,0.433) 9(-0.5,0.433) 10(-1,0.433)
  rect 0.4x0.665 smd paste-100 mask+0.051: 3(0,-0.433) 8(0,0.433)
  silkscreen extent -1.33,-1.11 1.33,0.58, body extent -1.26,-0.51 1.24,0.49, height 0.51
FBGA-153_L13.0-W11.5-P0.50_KLMAG1JETD-B041 [mm]
  round 0.25 smd paste-100 mask+0.05: A1(-3.25,3.25) A2(-2.75,3.25) A3(-2.25,3.25) A4(-1.75,3.25) A5(-1.25,3.25) A6(-0.75,3.25) A7(-0.25,3.25) A8(0.25,3.25) A9(0.75,3.25) A10(1.25,3.25) A11(1.75,3.25) A12(2.25,3.25) A13(2.75,3.25) A14(3.25,3.25) B1(-3.25,2.75) B2(-2.75,2.75) B3(-2.25,2.75) B4(-1.75,2.75) B5(-1.25,2.75) B6(-0.75,2.75) B7(-0.25,2.75) B8(0.25,2.75) B9(0.75,2.75) B10(1.25,2.75) B11(1.75,2.75) B12(2.25,2.75) B13(2.75,2.75) B14(3.25,2.75) C1(-3.25,2.25) C2(-2.75,2.25) C3(-2.25,2.25) C4(-1.75,2.25) C5(-1.25,2.25) C6(-0.75,2.25) C7(-0.25,2.25) C8(0.25,2.25) C9(0.75,2.25) C10(1.25,2.25) C11(1.75,2.25) C12(2.25,2.25) C13(2.75,2.25) C14(3.25,2.25) D1(-3.25,1.75) D2(-2.75,1.75) D3(-2.25,1.75) D4(-1.75,1.75) D12(2.25,1.75) D13(2.75,1.75) D14(3.25,1.75) E1(-3.25,1.25) E2(-2.75,1.25) E3(-2.25,1.25) E5(-1.25,1.25) E6(-0.75,1.25) E7(-0.25,1.25) E8(0.25,1.25) E9(0.75,1.25) E10(1.25,1.25) E12(2.25,1.25) E13(2.75,1.25) E14(3.25,1.25) F1(-3.25,0.75) F2(-2.75,0.75) F3(-2.25,0.75) F5(-1.25,0.75) F10(1.25,0.75) F12(2.25,0.75) F13(2.75,0.75) F14(3.25,0.75) G1(-3.25,0.25) G2(-2.75,0.25) G3(-2.25,0.25) G5(-1.25,0.25) G10(1.25,0.25) G12(2.25,0.25) G13(2.75,0.25) G14(3.25,0.25) H1(-3.25,-0.25) H2(-2.75,-0.25) H3(-2.25,-0.25) H5(-1.25,-0.25) H10(1.25,-0.25) H12(2.25,-0.25) H13(2.75,-0.25) H14(3.25,-0.25) J1(-3.25,-0.75) J2(-2.75,-0.75) J3(-2.25,-0.75) J5(-1.25,-0.75) J10(1.25,-0.75) J12(2.25,-0.75) J13(2.75,-0.75) J14(3.25,-0.75) K1(-3.25,-1.25) K2(-2.75,-1.25) K3(-2.25,-1.25) K5(-1.25,-1.25) K6(-0.75,-1.25) K7(-0.25,-1.25) K8(0.25,-1.25) K9(0.75,-1.25) K10(1.25,-1.25) K12(2.25,-1.25) K13(2.75,-1.25) K14(3.25,-1.25) L1(-3.25,-1.75) L2(-2.75,-1.75) L3(-2.25,-1.75) L12(2.25,-1.75) L13(2.75,-1.75) L14(3.25,-1.75) M1(-3.25,-2.25) M2(-2.75,-2.25) M3(-2.25,-2.25) M4(-1.75,-2.25) M5(-1.25,-2.25) M6(-0.75,-2.25) M7(-0.25,-2.25) M8(0.25,-2.25) M9(0.75,-2.25) M10(1.25,-2.25) M11(1.75,-2.25) M12(2.25,-2.25) M13(2.75,-2.25) M14(3.25,-2.25) N1(-3.25,-2.75) N2(-2.75,-2.75) N3(-2.25,-2.75) N4(-1.75,-2.75) N5(-1.25,-2.75) N6(-0.75,-2.75) N7(-0.25,-2.75) N8(0.25,-2.75) N9(0.75,-2.75) N10(1.25,-2.75) N11(1.75,-2.75) N12(2.25,-2.75) N13(2.75,-2.75) N14(3.25,-2.75) P1(-3.25,-3.25) P2(-2.75,-3.25) P3(-2.25,-3.25) P4(-1.75,-3.25) P5(-1.25,-3.25) P6(-0.75,-3.25) P7(-0.25,-3.25) P8(0.25,-3.25) P9(0.75,-3.25) P10(1.25,-3.25) P11(1.75,-3.25) P12(2.25,-3.25) P13(2.75,-3.25) P14(3.25,-3.25)
  silkscreen extent -6.22,-6.61 5.84,6.86, body extent -5.84,-6.6 5.84,6.48, height 0.25
FBGA-178_L11.5-W11.0_K4E6E304EC-TL [mil]
  round 11 smd paste-1000 mask+1.5: A1(-189,204.7) A2(-157.5,204.7) A3(-126,204.7) A4(-94.5,204.7) A5(-63,204.7) A6(-31.5,204.7) A8(31.5,204.7) A9(63,204.7) A10(94.5,204.7) A11(126,204.7) A12(157.5,204.7) A13(189,204.7) B1(-189,179.1) B2(-157.5,179.1) B3(-126,179.1) B4(-94.5,179.1) B5(-63,179.1) B6(-31.5,179.1) B8(31.5,179.1) B9(63,179.1) B10(94.5,179.1) B11(126,179.1) B12(157.5,179.1) B13(189,179.1) C2(-157.5,153.5) C3(-126,153.5) C4(-94.5,153.5) C5(-63,153.5) C6(-31.5,153.5) C8(31.5,153.5) C9(63,153.5) C10(94.5,153.5) C11(126,153.5) C12(157.5,153.5) D2(-157.5,127.9) D3(-126,127.9) D4(-94.5,127.9) D5(-63,127.9) D6(-31.5,127.9) D8(31.5,127.9) D9(63,127.9) D10(94.5,127.9) D11(126,127.9) D12(157.5,127.9) E2(-157.5,102.4) E3(-126,102.4) E4(-94.5,102.4) E5(-63,102.4) E6(-31.5,102.4) E8(31.5,102.4) E9(63,102.4) E10(94.5,102.4) E11(126,102.4) E12(157.5,102.4) F2(-157.5,76.8) F3(-126,76.8) F4(-94.5,76.8) F5(-63,76.8) F6(-31.5,76.8) F8(31.5,76.8) F9(63,76.8) F10(94.5,76.8) F11(126,76.8) F12(157.5,76.8) G2(-157.5,51.2) G3(-126,51.2) G4(-94.5,51.2) G5(-63,51.2) G6(-31.5,51.2) G8(31.5,51.2) G9(63,51.2) G10(94.5,51.2) G11(126,51.2) G12(157.5,51.2) H2(-157.5,25.6) H3(-126,25.6) H4(-94.5,25.6) H5(-63,25.6) H6(-31.5,25.6) H8(31.5,25.6) H9(63,25.6) H10(94.5,25.6) H11(126,25.6) H12(157.5,25.6) J2(-157.5,0) J3(-126,0) J4(-94.5,0) J5(-63,0) J6(-31.5,0) J8(31.5,0) J9(63,0) J10(94.5,0) J11(126,0) J12(157.5,0) K2(-157.5,-25.6) K3(-126,-25.6) K4(-94.5,-25.6) K5(-63,-25.6) K6(-31.5,-25.6) K8(31.5,-25.6) K9(63,-25.6) K10(94.5,-25.6) K11(126,-25.6) K12(157.5,-25.6) L2(-157.5,-51.2) L3(-126,-51.2) L4(-94.5,-51.2) L5(-63,-51.2) L6(-31.5,-51.2) L8(31.5,-51.2) L9(63,-51.2) L10(94.5,-51.2) L11(126,-51.2) L12(157.5,-51.2) M2(-157.5,-76.8) M3(-126,-76.8) M4(-94.5,-76.8) M5(-63,-76.8) M6(-31.5,-76.8) M8(31.5,-76.8) M9(63,-76.8) M10(94.5,-76.8) M11(126,-76.8) M12(157.5,-76.8) N2(-157.5,-102.4) N3(-126,-102.4) N4(-94.5,-102.4) N5(-63,-102.4) N6(-31.5,-102.4) N8(31.5,-102.4) N9(63,-102.4) N10(94.5,-102.4) N11(126,-102.4) N12(157.5,-102.4) P2(-157.5,-128) P3(-126,-128) P4(-94.5,-128) P5(-63,-128) P6(-31.5,-128) P8(31.5,-128) P9(63,-128) P10(94.5,-128) P11(126,-128) P12(157.5,-128) R2(-157.5,-153.5) R3(-126,-153.5) R4(-94.5,-153.5) R5(-63,-153.5) R6(-31.5,-153.5) R8(31.5,-153.5) R9(63,-153.5) R10(94.5,-153.5) R11(126,-153.5) R12(157.5,-153.5) T1(-189,-179.1) T2(-157.5,-179.1) T3(-126,-179.1) T4(-94.5,-179.1) T5(-63,-179.1) T6(-31.5,-179.1) T8(31.5,-179.1) T9(63,-179.1) T10(94.5,-179.1) T11(126,-179.1) T12(157.5,-179.1) T13(189,-179.1) U1(-189,-204.7) U2(-157.5,-204.7) U3(-126,-204.7) U4(-94.5,-204.7) U5(-63,-204.7) U6(-31.5,-204.7) U8(31.5,-204.7) U9(63,-204.7) U10(94.5,-204.7) U11(126,-204.7) U12(157.5,-204.7) U13(189,-204.7)
  silkscreen extent -220,-229 220,230, body extent -220,-230 220,230, height 10
HDMI-SMD_KH-HDMI-19P-CU [mm]
  rect 0.3x2.6 smd paste-100 mask+0.051: 1(4.5,3.36) 2(4,3.36) 3(3.5,3.36) 4(3,3.36) 5(2.5,3.36) 6(2,3.36) 7(1.5,3.36) 8(1,3.36) 9(0.5,3.36) 10(0,3.36) 11(-0.5,3.36) 12(-1,3.36) 13(-1.5,3.36) 14(-2,3.36) 15(-2.5,3.36) 16(-3,3.36) 17(-3.5,3.36) 18(-4,3.36) 19(-4.5,3.36)
  oval 2x3.5 hole 1 slot 2.8 at 90 deg: 20(-7.25,2.6) 21(7.25,2.6)
  oval 2x2.5 hole 1 slot 1.8 at 90 deg: 22(-7.25,-3.36) 23(7.25,-3.36)
  silkscreen extent -7.62,-8.13 7.62,4.57, body extent -7.45,-7.89 7.55,4.31, height 6.29
HDR-TH_6P-P2.54-V-M [mm]
  rect 1.7x1.7 hole 1.1: 1(-6.35,0)
  round 1.7 hole 1.1: 2(-3.81,0) 3(-1.27,0) 4(1.27,0) 5(3.81,0) 6(6.35,0)
  silkscreen extent -7.6,-1.3 7.65,1.3, body extent -7.71,-1.38 7.53,1.16, height 9.63
IND-SMD_L4.0-W4.0 [mm]
  rect 1.6x3.5 smd: 1(-1.6,0) 2(1.6,0)
  silkscreen extent -2.08,-2.1 2.08,2.1, body extent -1.97,-2.01 2.03,1.99, height 1.6
IND-SMD_L6.0-W6.0_FNR60XXS [mm]
  rect 2.5x5.7 smd: 1(-2.35,-0.013) 2(2.35,0.013)
  silkscreen extent -1.69,-3 1.69,3, body extent -3.09,-3.01 2.91,2.99, height 2.59
LCD-SMD_10P-P0.70-L44.8-W8.6_N099-0416THBIG01-H10 [mm]
  rect 0.4x3 smd: 1(3.658,-0.254) 2(2.958,-0.254) 3(2.258,-0.254) 4(1.558,-0.254) 5(0.858,-0.254) 6(0.158,-0.254) 7(-0.542,-0.254) 8(-1.242,-0.254) 9(-1.942,-0.254) 10(-2.642,-0.254) 11(-3.342,-0.254) 12(-4.042,-0.254) 13(-4.742,-0.254)
  silkscreen extent -9.44,-16 8.16,15, body extent -9.28,-16.4 8.27,15.27, height 1.37
LED0603-GR [mm]
  rect 0.8x0.8 smd: 1(-0.926,0) 2(0.672,0)
  silkscreen extent -1.62,-0.75 1.26,0.76, body extent -0.93,-0.4 0.67,0.4, height 0.53
LED0603-RD [mm]
  rect 0.8x0.8 smd: 1(-0.926,0) 2(0.672,0)
  silkscreen extent -1.62,-0.75 1.26,0.76, body extent -0.93,-0.38 0.67,0.42, height 0.53
MC-146_4P-L6.7-W1.5-P0.85-TL [mm]
  rect 1.2x0.6 smd: 1(-3.15,-0.425) 2(3.15,-0.425) 3(3.15,0.425) 4(-3.15,0.425)
  silkscreen extent -3.53,-1.12 2.41,0.76, body extent -3.68,-0.77 3.7,0.73, height 1.5
QFN-44_L12.0-W12.0-P0.90-TL_AP6212 [mm]
  rect 1.5x0.6 smd paste+0 mask+0.05: 1(-5.889,4.496) 2(-5.889,3.607) 3(-5.889,2.692) 4(-5.889,1.803) 5(-5.889,0.889) 6(-5.889,0) 7(-5.889,-0.889) 8(-5.889,-1.803) 9(-5.889,-2.692) 10(-5.889,-3.607) 11(-5.889,-4.496) 23(5.889,-4.496) 24(5.889,-3.607) 25(5.889,-2.692) 26(5.889,-1.803) 27(5.889,-0.889) 28(5.889,0) 29(5.889,0.889) 30(5.889,1.803) 31(5.889,2.692) 32(5.889,3.607) 33(5.889,4.496)
  rect 0.6x1.5 smd paste+0 mask+0.05: 12(-4.496,-5.889) 13(-3.607,-5.889) 14(-2.692,-5.889) 15(-1.803,-5.889) 16(-0.889,-5.889) 17(0,-5.889) 18(0.889,-5.889) 19(1.803,-5.889) 20(2.692,-5.889) 21(3.607,-5.889) 22(4.496,-5.889) 34(4.496,5.889) 35(3.607,5.889) 36(2.692,5.889) 37(1.803,5.889) 38(0.889,5.889) 39(0,5.889) 40(-0.889,5.889) 41(-1.803,5.889) 42(-2.692,5.889) 43(-3.607,5.889) 44(-4.496,5.889)
  round 0.6 smd paste+0 mask+0.05: 45(-2.7,3.607) 46(-0.9,3.607) 47(0.9,3.607)
  silkscreen extent -5.99,-5.99 5.99,5.99, body extent -5.97,-5.97 5.97,6.02, height 0.51
QFN-56_L7.0-W7.0-P0.40-TL-EP4.6 [mm]
  oval 0.665x0.2 smd paste-100 mask+0.051: 1(-3.408,2.6) 2(-3.408,2.2) 3(-3.408,1.8) 4(-3.408,1.4) 5(-3.408,1) 6(-3.408,0.6) 7(-3.408,0.2) 8(-3.408,-0.2) 9(-3.408,-0.6) 10(-3.408,-1) 11(-3.408,-1.4) 12(-3.408,-1.8) 13(-3.408,-2.2) 14(-3.408,-2.6) 29(3.408,-2.6) 30(3.408,-2.2) 31(3.408,-1.8) 32(3.408,-1.4) 33(3.408,-1) 34(3.408,-0.6) 35(3.408,-0.2) 36(3.408,0.2) 37(3.408,0.6) 38(3.408,1) 39(3.408,1.4) 40(3.408,1.8) 41(3.408,2.2) 42(3.408,2.6)
  oval 0.2x0.665 smd paste-100 mask+0.051: 15(-2.6,-3.408) 16(-2.2,-3.408) 17(-1.8,-3.408) 18(-1.4,-3.408) 19(-1,-3.408) 20(-0.6,-3.408) 21(-0.2,-3.408) 22(0.2,-3.408) 23(0.6,-3.408) 24(1,-3.408) 25(1.4,-3.408) 26(1.8,-3.408) 27(2.2,-3.408) 28(2.6,-3.408) 43(2.6,3.408) 44(2.2,3.408) 45(1.8,3.408) 46(1.4,3.408) 47(1,3.408) 48(0.6,3.408) 49(0.2,3.408) 50(-0.2,3.408) 51(-0.6,3.408) 52(-1,3.408) 53(-1.4,3.408) 54(-1.8,3.408) 55(-2.2,3.408) 56(-2.6,3.408)
  rect 4.6x4.6 smd paste-100 mask+0.051: 57(0,0)
  silkscreen extent -4.04,-3.58 3.58,4.04, body extent -3.5,-3.51 3.5,3.53, height 0.25
R0402 [mm]
  rect 0.566x0.54 smd paste-100 mask+0.051: 1(-0.433,0) 2(0.433,0)
  silkscreen extent -0.94,-0.5 0.94,0.5, body extent -0.49,-0.26 0.51,0.24, height 0.35
RF-SMD_FRF05002-JSS103M [mm]
  rect 1x1.05 smd paste+0 mask+0.05: 1(0,-0.762)
  rect 1.05x2.2 smd paste+0 mask+0.05: 2(-1.475,0.762) 3(1.475,0.762)
  silkscreen extent -1.3,-0.63 1.3,2.35, body extent -1.49,-0.87 1.51,2.23, height 1.25
SMA_L4.3-W2.6-LS5.2-RD [mm]
  rect 2x2 smd: 1(-2.2,0) 2(2.2,0)
  silkscreen extent -2.98,-1.5 2.6,1.5, body extent -2.35,-1.3 2.35,1.3, height 1.99
SOD-323_L1.8-W1.3-LS2.5-RD [mm]
  rect 1x0.75 smd: 1(-1.173,0) 2(1.173,0)
  silkscreen extent -1.08,-0.8 0.9,0.8, body extent -1.24,-0.7 1.26,0.7, height 0.62
SOT-23-3_L2.9-W1.6-P1.90-LS2.8-BR [mm]
  rect 1.07x0.6 smd: 1(1.235,-0.95) 2(1.235,0.95) 3(-1.235,0)
  silkscreen extent -0.88,-1.54 0.88,1.54, body extent -1.25,-1.5 1.25,1.5, height 1.1
SOT-23-5_L3.0-W1.7-P0.95-LS2.8-BL [mm]
  rect 0.49x1.157 smd: 1(-0.95,-1.154) 2(0,-1.154) 3(0.95,-1.154)
  rect 0.49x1.175 smd: 4(0.95,1.154) 5(-0.95,1.154)
  silkscreen extent -1.8,-1.29 1.53,0.85, body extent -1.5,-1.42 1.5,1.42, height 1.22
SOT-23_L2.9-W1.3-P1.90-LS2.4-BR [mm]
  rect 1x0.8 smd: 1(1.15,-0.95) 2(1.15,0.95) 3(-1.15,0)
  silkscreen extent -0.7,-1.5 0.7,1.5, body extent -1.18,-1.46 1.18,1.46, height 1.12
SW-SMD_L3.9-W3.0-P4.45 [mm]
  rect 1.23x1.36 smd: 1(-2.185,0) 2(2.185,0)
  silkscreen extent -2.03,-1.62 2.25,1.62, body extent -2.15,-1.45 2.15,1.45, height 1.82